# Altium PCB LAY-90818_A.brd.PcbDoc (part 1 of 6)
Units mil, origin at the board's own origin, x right, y up, seen from the top; angles counter-clockwise.
Board outline 4645.67 x 2165.35 mil, 4 copper layers (TOP, GND, POWER, BOTTOM), stack 60.45 mil thick; 414 components, 348 nets, 1441 pads, 720 vias.
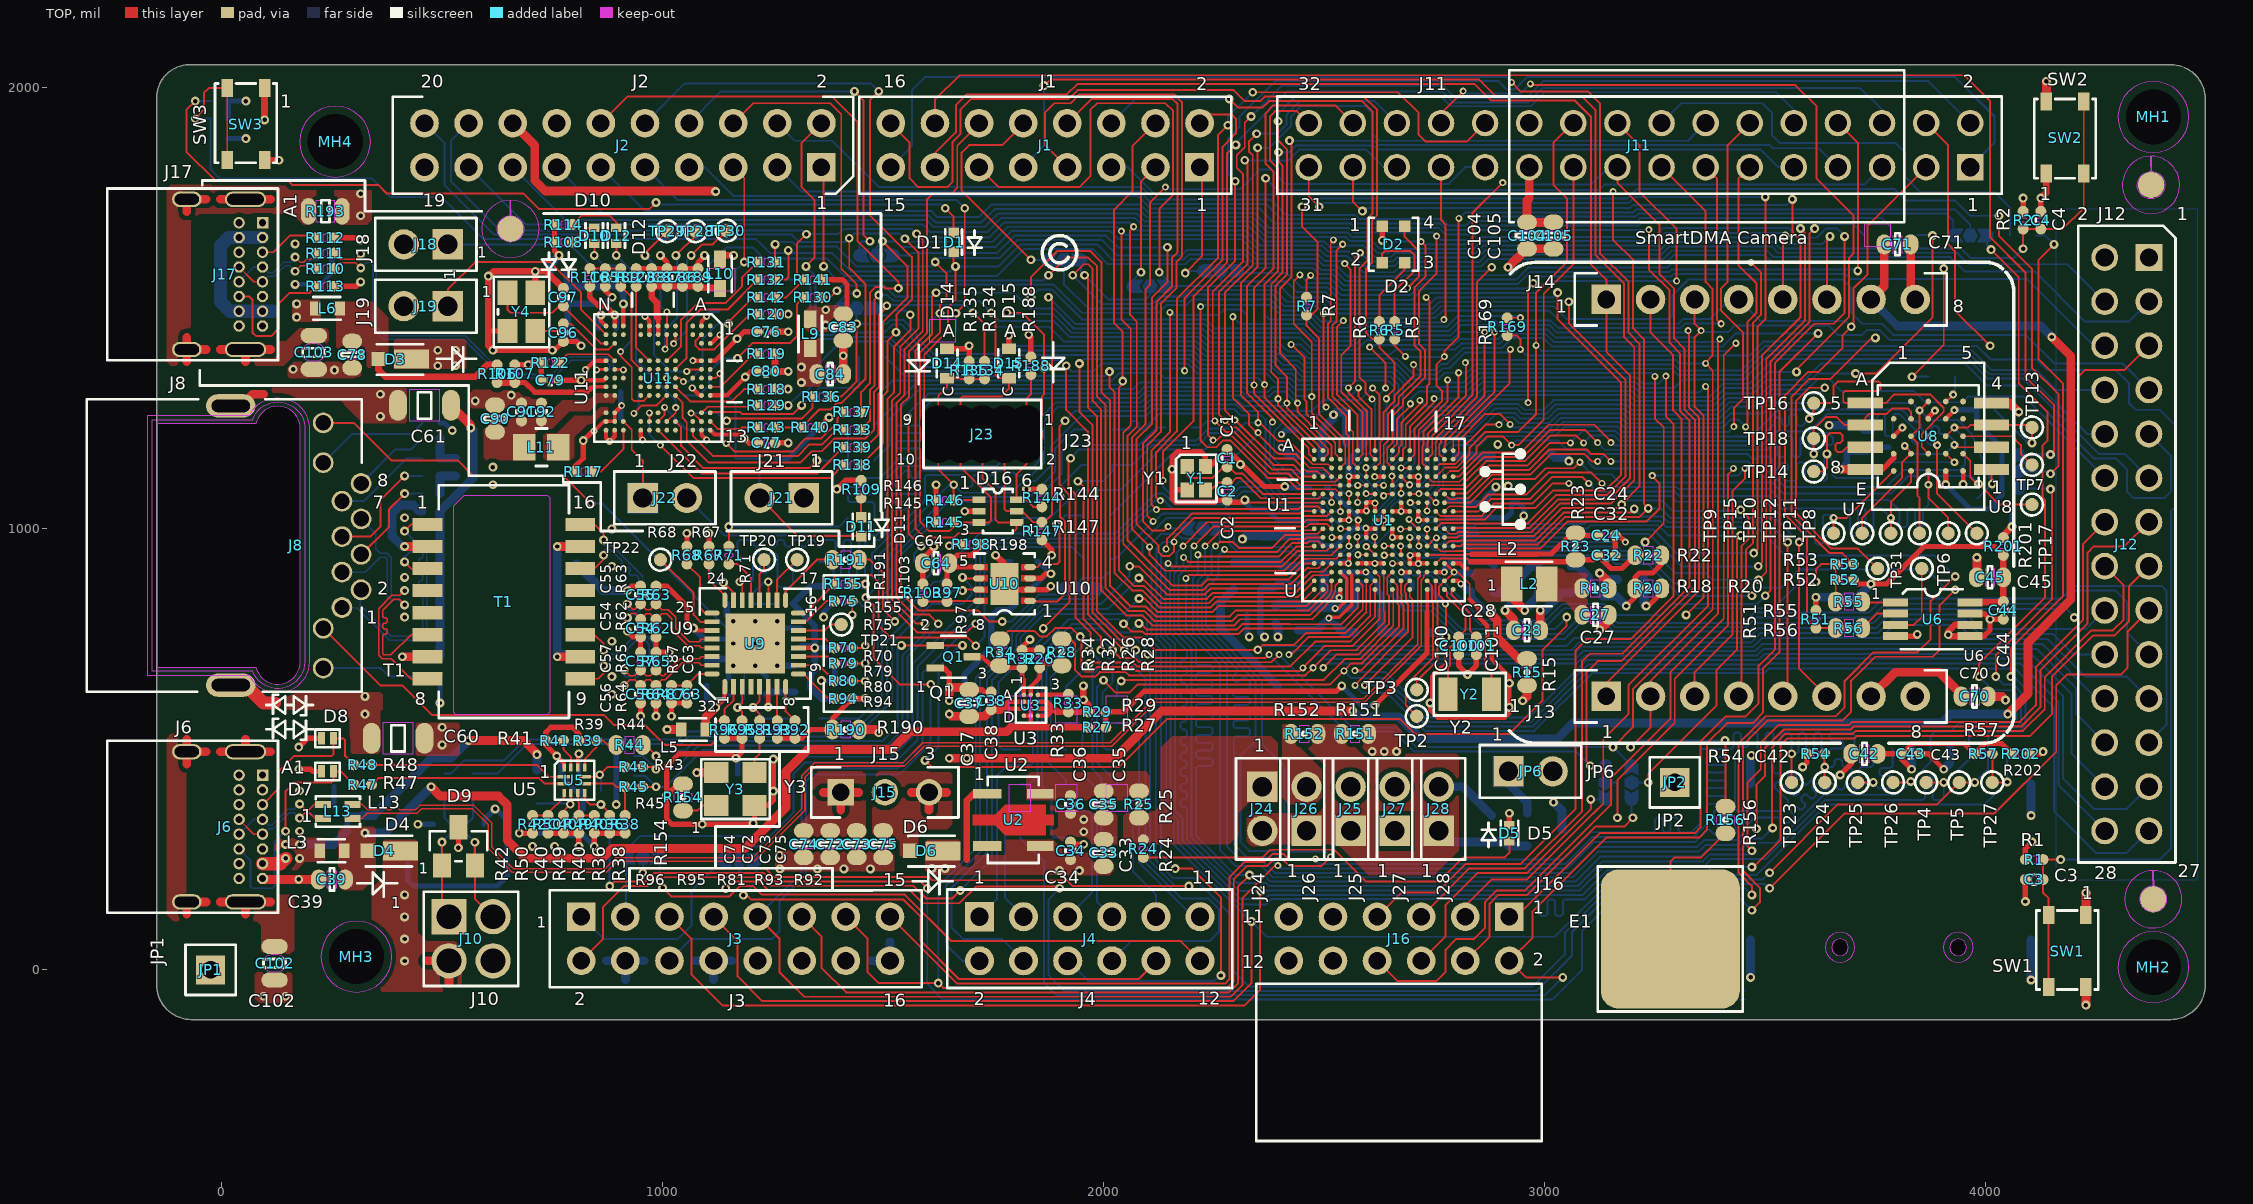
[diagram p0: TOP view]
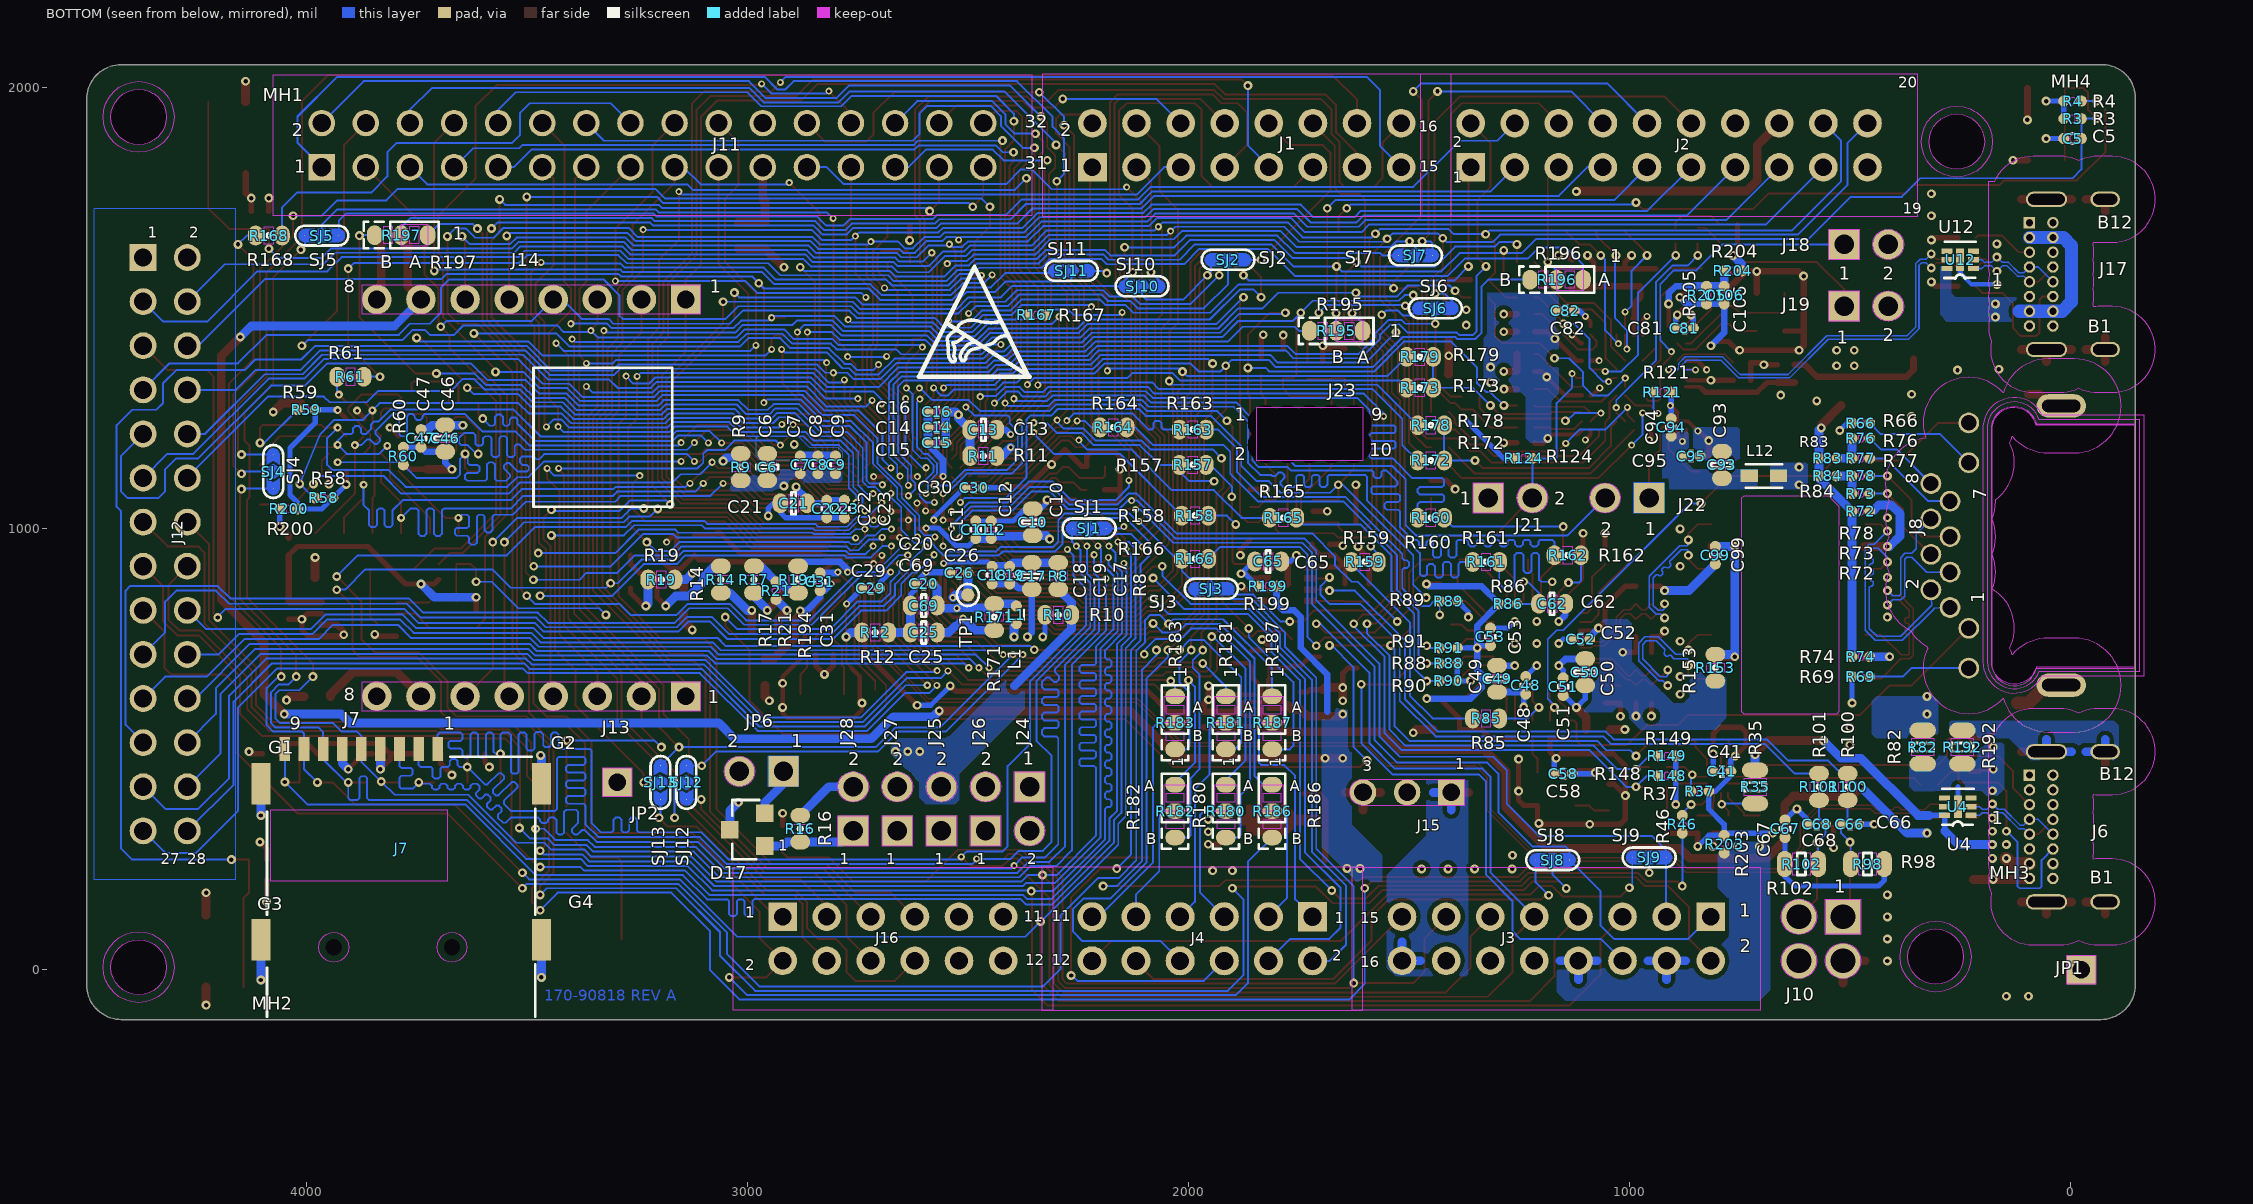
[diagram p1: BOTTOM view, seen from below]
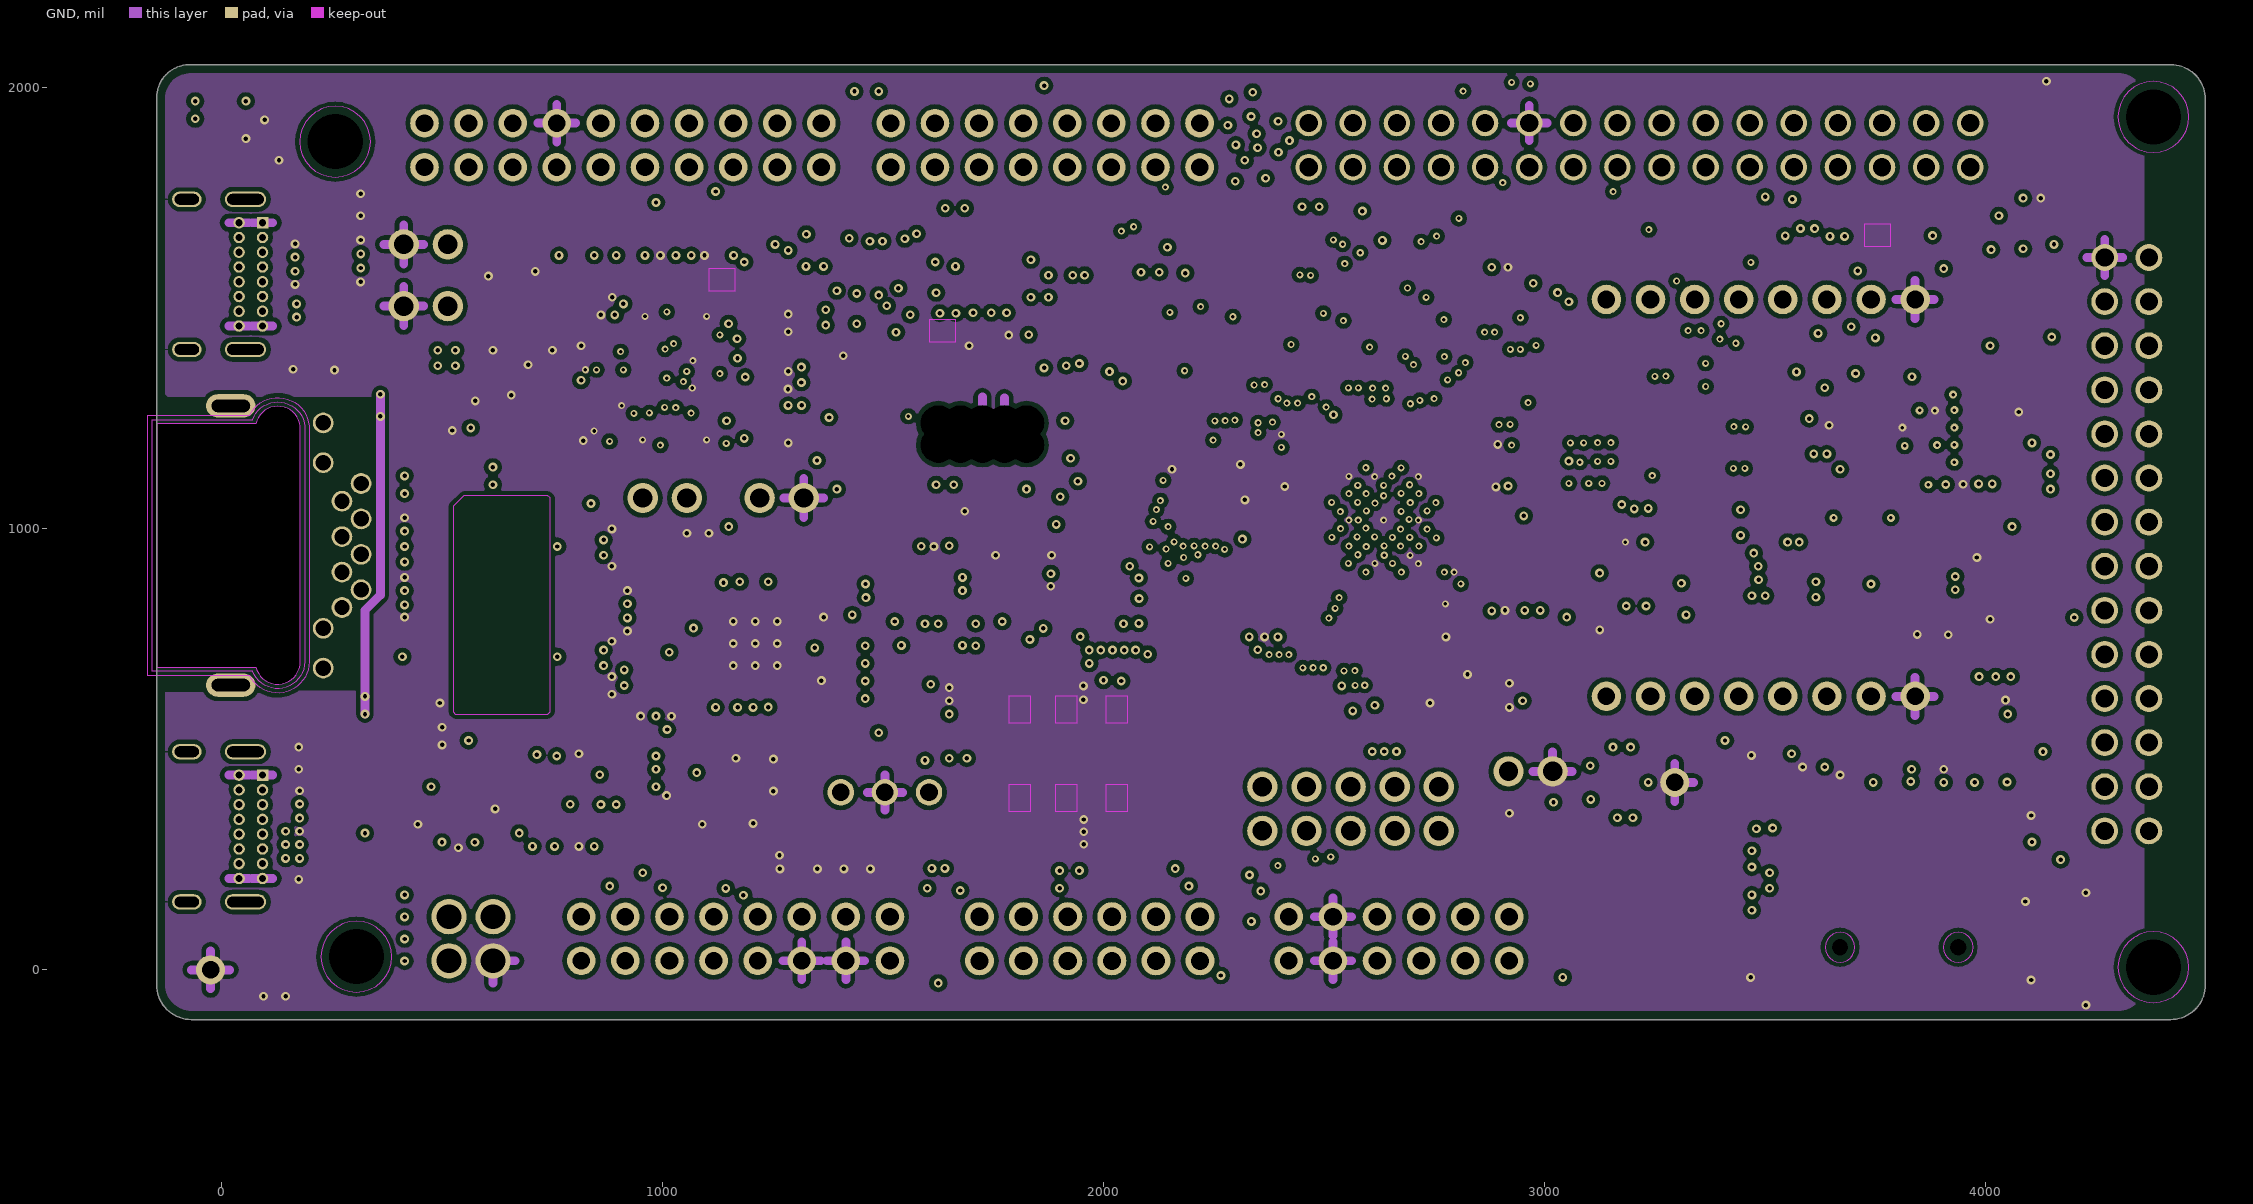
[diagram p2: GND]
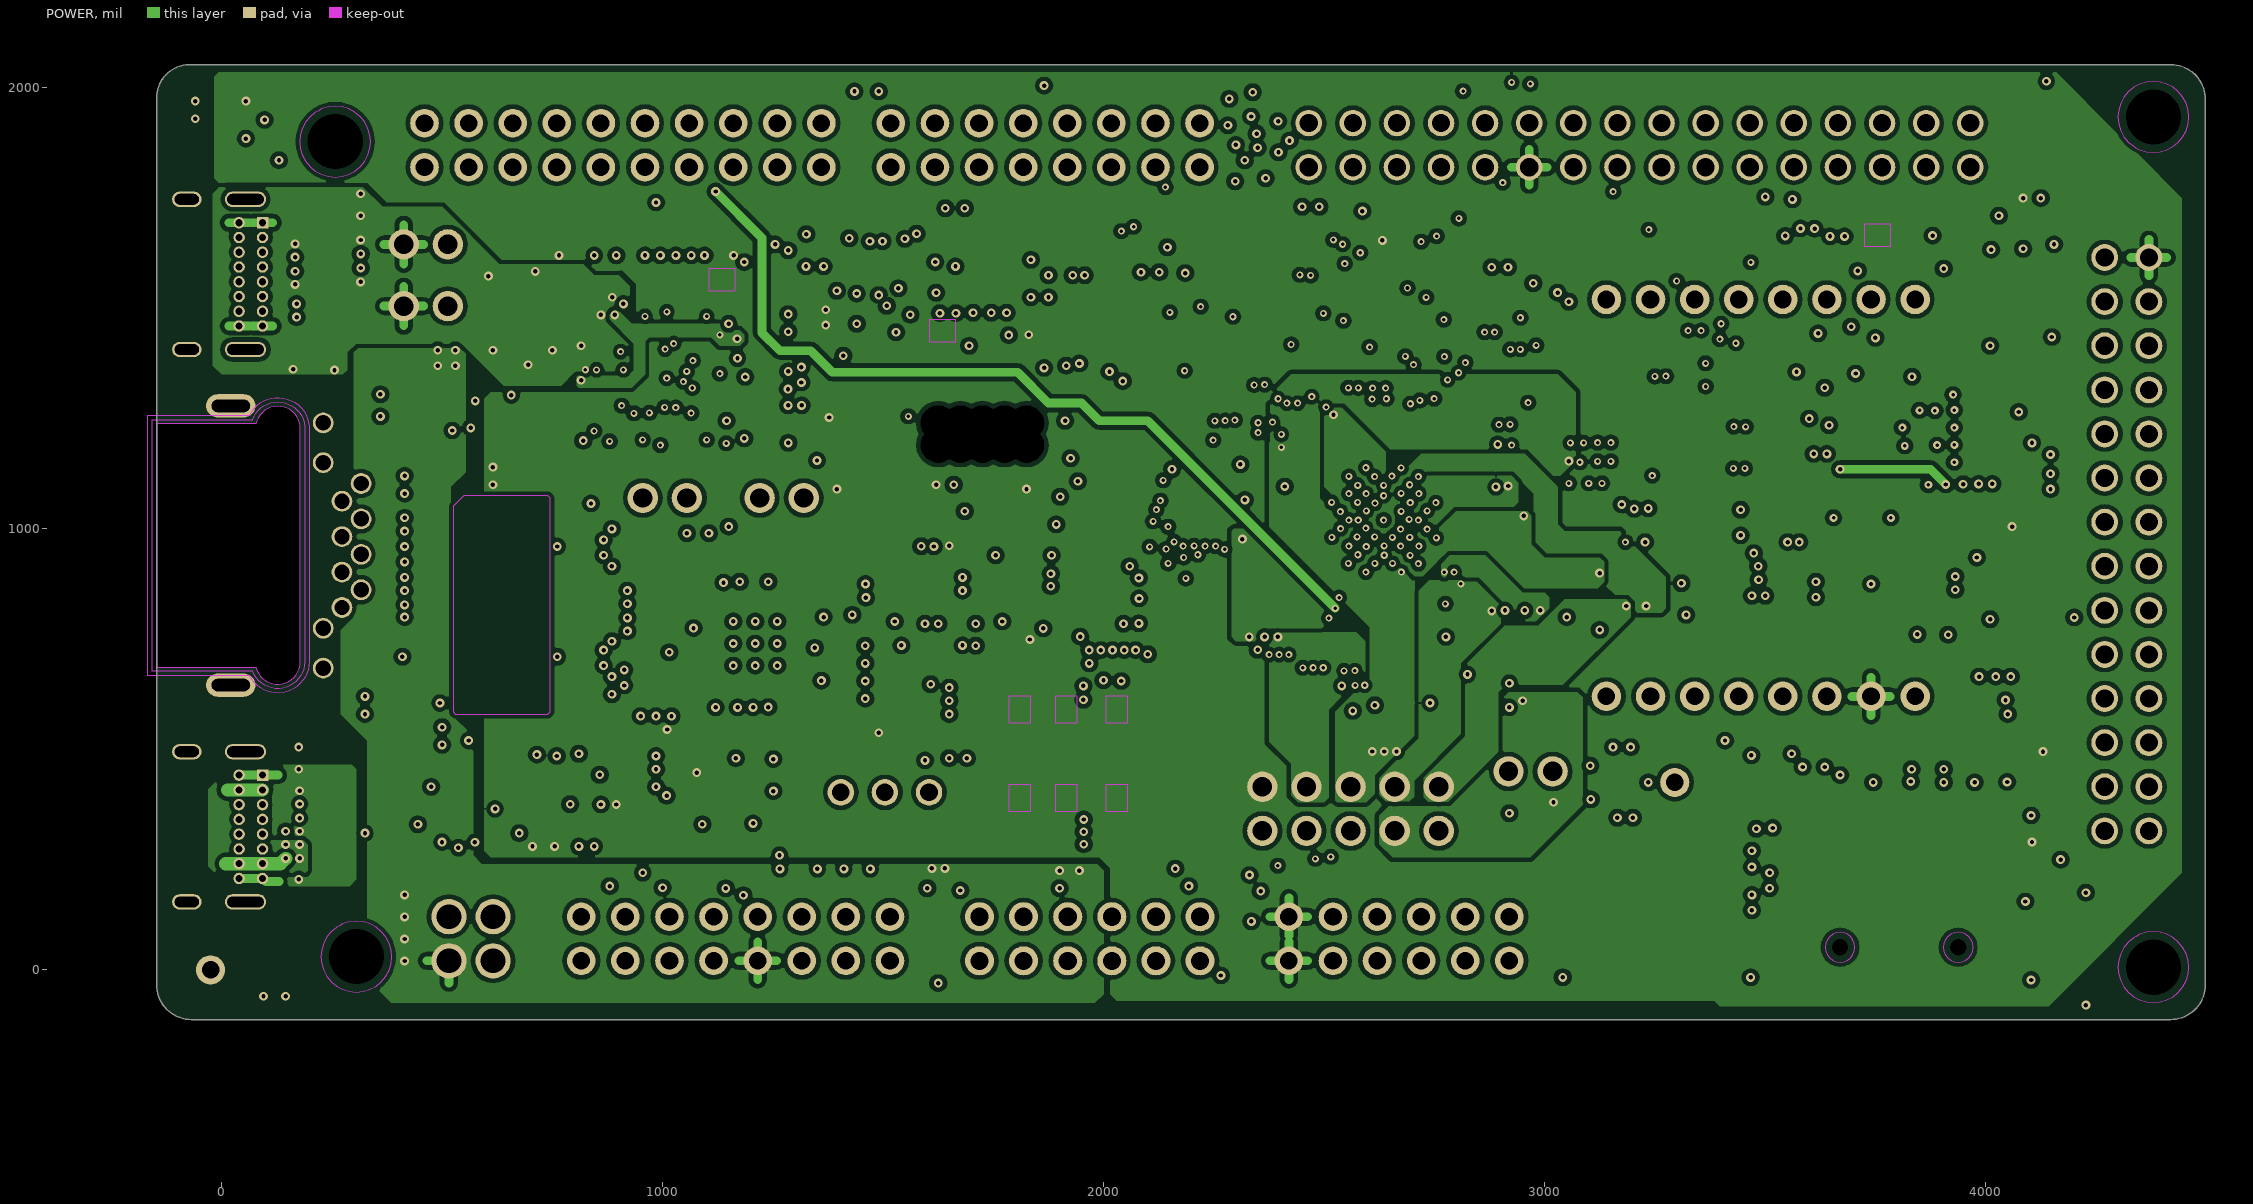
[diagram p3: POWER]

## Layer stack, top to bottom
Top Solder: solder mask 0.4, Solder Resist, Dk 3.5
TOP: signal copper 1.8
Dielectric 1: core 3.01, FR-4, Dk 4.5
GND: signal copper 1.2
Dielectric2: core 48.4299, FR-4, Dk 3.5
POWER: signal copper 1.2
Dielectric3: core 3.01, FR-4, Dk 3.5
BOTTOM: signal copper 1.8
Bottom Solder: solder mask 0.4, Solder Resist, Dk 3.5

## Board outline
4281.69,2052.68 4419.49,2052.68 cw(c4419.49,1973.94) 4498.23,1973.94 4498.23,-33.94 cw(c4419.49,-33.94) 4419.49,-112.68 4301.38,-112.68 305.31,-112.68 -68.7,-112.68 cw(c-68.7,-33.94) -147.44,-33.94 -147.44,1977.24 cw(c-71.94,1977.24) -75.18,2052.68
cut-out: -147.44,1237.84 -147.44,686.65 77.7,686.65 ccw(c127.33,698.64) 178.38,698.67 178.38,1232.2 ccw(c127.57,1226.7) 77.7,1237.84

## Design rules (kind name [scope] priority, off if disabled: settings)
Clearance [All] p1: gap=10 ignorepadtopadclearanceinfootprint=FALSE except(0: Arc-Hole Track-Hole SMDPad-Hole THPad-Hole Via-Hole Fill-Hole Poly-Hole Region-Hole Text-Hole)
DiffPairsRouting [All] p1: maxlimit=10 minlimit=10 mostfreqgap=10 toplayer_minwidth=15 toplayer_maxwidth=15 toplayer_prefwidth=15 midlayer1_minwidth=15 midlayer1_maxwidth=15 midlayer1_prefwidth=15 midlayer2_minwidth=15 midlayer2_maxwidth=15 midlayer2_prefwidth=15 bottomlayer_minwidth=15 bottomlayer_maxwidth=15 bottomlayer_prefwidth=15 maxuncoupledlength=500
PlaneConnect [All] p1: planeconnectstyle=Direct reliefexpansion=20 reliefentries=4 reliefconductorwidth=10 reliefairgap=10
PolygonConnect [All] p1: connectstyle=Direct reliefconductorwidth=10 reliefentries=4 polygonreliefangle="90 Angle" airgapwidth=10
RoomDefinition RoomsKeepOut15 [All vs False] p1: confinementstyle=ConfineOut formatcopy=TRUE lockcomponents=FALSE outline 475.86,30 474.41,52.24 470.06,74.09 462.9,95.2 453.04,115.18 440.66,133.71 425.97,150.47 409.21,165.16 390.68,177.54 370.7,187.4 349.59,194.56 327.74,198.91 305.5,200.36 283.26,198.91 261.41,194.56 240.3,187.4 220.32,177.54 201.79,165.16 185.03,150.47 170.34,133.71 157.96,115.18 148.1,95.2 140.94,74.09 136.59,52.24 135.14,30 136.59,7.76 140.94,-14.09 148.1,-35.2 157.96,-55.18 170.34,-73.71 185.03,-90.47 201.79,-105.16 220.32,-117.54 240.3,-127.4 261.41,-134.56 283.26,-138.91 305.5,-140.36 327.74,-138.91 349.59,-134.56 370.7,-127.4 390.68,-117.54 409.21,-105.16 425.97,-90.47 440.66,-73.71 453.04,-55.18 462.9,-35.2 470.06,-14.09 474.41,7.76 475.86,30
RoomDefinition RoomsKeepOut14 [All vs False] p2: confinementstyle=ConfineOut formatcopy=TRUE lockcomponents=FALSE outline 427.86,1878 426.41,1900.24 422.06,1922.09 414.9,1943.2 405.04,1963.18 392.66,1981.71 377.97,1998.47 361.21,2013.16 342.68,2025.54 322.7,2035.4 301.59,2042.56 279.74,2046.91 257.5,2048.36 235.26,2046.91 213.41,2042.56 192.3,2035.4 172.32,2025.54 153.79,2013.16 137.03,1998.47 122.34,1981.71 109.96,1963.18 100.1,1943.2 92.94,1922.09 88.59,1900.24 87.14,1878 88.59,1855.76 92.94,1833.91 100.1,1812.8 109.96,1792.82 122.34,1774.29 137.03,1757.53 153.79,1742.84 172.32,1730.46 192.3,1720.6 213.41,1713.44 235.26,1709.09 257.5,1707.64 279.74,1709.09 301.59,1713.44 322.7,1720.6 342.68,1730.46 361.21,1742.84 377.97,1757.53 392.66,1774.29 405.04,1792.82 414.9,1812.8 422.06,1833.91 426.41,1855.76 427.86,1878
RoomDefinition RoomsKeepOut13 [All vs False] p3: confinementstyle=ConfineOut formatcopy=TRUE lockcomponents=FALSE outline 4500.61,61 4499.15,83.24 4494.8,105.09 4487.64,126.2 4477.78,146.18 4465.4,164.71 4450.71,181.47 4433.95,196.16 4415.42,208.54 4395.44,218.4 4374.33,225.56 4352.48,229.91 4330.24,231.36 4308,229.91 4286.15,225.56 4265.05,218.4 4245.06,208.54 4226.53,196.16 4209.77,181.47 4195.08,164.71 4182.7,146.18 4172.84,126.2 4165.68,105.09 4161.33,83.24 4159.88,61 4161.33,38.76 4165.68,16.91 4172.84,-4.2 4182.7,-24.18 4195.08,-42.71 4209.77,-59.47 4226.53,-74.16 4245.06,-86.54 4265.05,-96.4 4286.15,-103.56 4308,-107.91 4330.24,-109.36 4352.48,-107.91 4374.33,-103.56 4395.44,-96.4 4415.42,-86.54 4433.95,-74.16 4450.71,-59.47 4465.4,-42.71 4477.78,-24.18 4487.64,-4.2 4494.8,16.91 4499.15,38.76 4500.61,61
RoomDefinition RoomsKeepin12 [All vs False] p4: confinementstyle=ConfineIn formatcopy=TRUE lockcomponents=FALSE outline 4430,-85 4470,-45 4470,1975 4415,2030 -80,2030 -135,1975 -135,-40 -80,-95 60,-95 65,-95 80,-110 170,-110 195,-85
RoomDefinition RoomsKeepin11 [All vs False] p5: confinementstyle=ConfineIn formatcopy=TRUE lockcomponents=FALSE outline 4430,-85 4470,-45 4470,1975 4415,2030 -80,2030 -135,1975 -135,-40 -80,-95 60,-95 65,-95 80,-110 170,-110 195,-85
RoomDefinition RoomsKeepOut10 [All vs False] p6: confinementstyle=ConfineOut formatcopy=TRUE lockcomponents=FALSE outline 4500.61,6 4499.13,24.83 4494.72,43.2 4487.49,60.65 4477.62,76.75 4465.36,91.12 4450.99,103.38 4434.89,113.25 4417.44,120.48 4399.07,124.89 4380.24,126.37 4361.41,124.89 4343.04,120.48 4325.59,113.25 4320.22,109.96 4309.49,103.38 4295.13,91.12 4282.86,76.75 4272.99,60.65 4265.76,43.2 4261.35,24.83 4259.87,6 4261.35,-12.83 4265.76,-31.2 4272.99,-48.65 4282.86,-64.75 4295.13,-79.12 4309.49,-91.38 4320.22,-97.96 4325.59,-101.25 4343.04,-108.48 4361.41,-112.89 4380.24,-114.37 4399.07,-112.89 4417.44,-108.48 4434.89,-101.25 4450.99,-91.38 4465.36,-79.12 4477.62,-64.75 4487.49,-48.65 4494.72,-31.2 4499.13,-12.83 4500.61,6
RoomDefinition RoomsKeepOut9 [All vs False] p7: confinementstyle=ConfineOut formatcopy=TRUE lockcomponents=FALSE outline 4500.61,6 4499.13,24.83 4494.72,43.2 4487.49,60.65 4477.62,76.75 4465.36,91.12 4450.99,103.38 4434.89,113.25 4417.44,120.48 4399.07,124.89 4380.24,126.37 4361.41,124.89 4343.04,120.48 4325.59,113.25 4320.22,109.96 4309.49,103.38 4295.13,91.12 4282.86,76.75 4272.99,60.65 4265.76,43.2 4261.35,24.83 4259.87,6 4261.35,-12.83 4265.76,-31.2 4272.99,-48.65 4282.86,-64.75 4295.13,-79.12 4309.49,-91.38 4320.22,-97.96 4325.59,-101.25 4343.04,-108.48 4361.41,-112.89 4380.24,-114.37 4399.07,-112.89 4417.44,-108.48 4434.89,-101.25 4450.99,-91.38 4465.36,-79.12 4477.62,-64.75 4487.49,-48.65 4494.72,-31.2 4499.13,-12.83 4500.61,6
RoomDefinition RoomsKeepOut8 [All vs False] p8: confinementstyle=ConfineOut formatcopy=TRUE lockcomponents=FALSE outline 4500.61,1884 4499.15,1906.24 4494.8,1928.09 4487.64,1949.2 4477.78,1969.18 4465.4,1987.71 4450.71,2004.47 4433.95,2019.16 4415.42,2031.54 4395.44,2041.4 4374.33,2048.56 4352.48,2052.91 4330.24,2054.36 4308,2052.91 4286.15,2048.56 4265.05,2041.4 4245.06,2031.54 4226.53,2019.16 4209.77,2004.47 4195.08,1987.71 4182.7,1969.18 4172.84,1949.2 4165.68,1928.09 4161.33,1906.24 4159.88,1884 4161.33,1861.76 4165.68,1839.91 4172.84,1818.8 4182.7,1798.82 4195.08,1780.29 4209.77,1763.53 4226.53,1748.84 4245.06,1736.46 4265.05,1726.6 4286.15,1719.44 4308,1715.09 4330.24,1713.64 4352.48,1715.09 4374.33,1719.44 4395.44,1726.6 4415.42,1736.46 4433.95,1748.84 4450.71,1763.53 4465.4,1780.29 4477.78,1798.82 4487.64,1818.8 4494.8,1839.91 4499.15,1861.76 4500.61,1884
RoomDefinition RoomsKeepOut7 [All vs False] p9: confinementstyle=ConfineOut formatcopy=TRUE lockcomponents=FALSE outline 4500.61,1934 4499.13,1952.83 4494.72,1971.2 4487.49,1988.65 4477.62,2004.75 4465.36,2019.12 4450.99,2031.38 4434.89,2041.25 4417.44,2048.48 4399.07,2052.89 4380.24,2054.37 4361.41,2052.89 4343.04,2048.48 4325.59,2041.25 4320.22,2037.96 4309.49,2031.38 4295.13,2019.12 4282.86,2004.75 4272.99,1988.65 4265.76,1971.2 4261.35,1952.83 4259.87,1934 4261.35,1915.17 4265.76,1896.8 4272.99,1879.35 4282.86,1863.25 4295.13,1848.88 4309.49,1836.62 4320.22,1830.04 4325.59,1826.75 4343.04,1819.52 4361.41,1815.11 4380.24,1813.63 4399.07,1815.11 4417.44,1819.52 4434.89,1826.75 4450.99,1836.62 4465.36,1848.88 4477.62,1863.25 4487.49,1879.35 4494.72,1896.8 4499.13,1915.17 4500.61,1934
RoomDefinition RoomsKeepOut6 [All vs False] p10: confinementstyle=ConfineOut formatcopy=TRUE lockcomponents=FALSE outline 4500.61,1934 4499.13,1952.83 4494.72,1971.2 4487.49,1988.65 4477.62,2004.75 4465.36,2019.12 4450.99,2031.38 4434.89,2041.25 4417.44,2048.48 4399.07,2052.89 4380.24,2054.37 4361.41,2052.89 4343.04,2048.48 4325.59,2041.25 4320.22,2037.96 4309.49,2031.38 4295.13,2019.12 4282.86,2004.75 4272.99,1988.65 4265.76,1971.2 4261.35,1952.83 4259.87,1934 4261.35,1915.17 4265.76,1896.8 4272.99,1879.35 4282.86,1863.25 4295.13,1848.88 4309.49,1836.62 4320.22,1830.04 4325.59,1826.75 4343.04,1819.52 4361.41,1815.11 4380.24,1813.63 4399.07,1815.11 4417.44,1819.52 4434.89,1826.75 4450.99,1836.62 4465.36,1848.88 4477.62,1863.25 4487.49,1879.35 4494.72,1896.8 4499.13,1915.17 4500.61,1934
RoomDefinition RoomsKeepOut5 [All vs False] p11: confinementstyle=ConfineOut formatcopy=TRUE lockcomponents=FALSE outline 377.87,1878 376.39,1896.83 371.98,1915.2 364.75,1932.65 354.88,1948.75 342.62,1963.12 328.25,1975.38 312.15,1985.25 294.7,1992.48 276.33,1996.89 257.5,1998.37 238.67,1996.89 220.3,1992.48 202.85,1985.25 197.48,1981.96 186.75,1975.38 172.38,1963.12 160.12,1948.75 150.25,1932.65 143.02,1915.2 138.61,1896.83 137.13,1878 138.61,1859.17 143.02,1840.8 150.25,1823.35 160.12,1807.25 172.38,1792.88 186.75,1780.62 197.48,1774.04 202.85,1770.75 220.3,1763.52 238.67,1759.11 257.5,1757.63 276.33,1759.11 294.7,1763.52 312.15,1770.75 328.25,1780.62 342.62,1792.88 354.88,1807.25 364.75,1823.35 371.98,1840.8 376.39,1859.17 377.87,1878
RoomDefinition RoomsKeepOut4 [All vs False] p12: confinementstyle=ConfineOut formatcopy=TRUE lockcomponents=FALSE outline 377.87,1878 376.39,1896.83 371.98,1915.2 364.75,1932.65 354.88,1948.75 342.62,1963.12 328.25,1975.38 312.15,1985.25 294.7,1992.48 276.33,1996.89 257.5,1998.37 238.67,1996.89 220.3,1992.48 202.85,1985.25 197.48,1981.96 186.75,1975.38 172.38,1963.12 160.12,1948.75 150.25,1932.65 143.02,1915.2 138.61,1896.83 137.13,1878 138.61,1859.17 143.02,1840.8 150.25,1823.35 160.12,1807.25 172.38,1792.88 186.75,1780.62 197.48,1774.04 202.85,1770.75 220.3,1763.52 238.67,1759.11 257.5,1757.63 276.33,1759.11 294.7,1763.52 312.15,1770.75 328.25,1780.62 342.62,1792.88 354.88,1807.25 364.75,1823.35 371.98,1840.8 376.39,1859.17 377.87,1878
RoomDefinition RoomsKeepOut3 [All vs False] p13: confinementstyle=ConfineOut formatcopy=TRUE lockcomponents=FALSE outline 425.87,30 424.39,48.83 419.98,67.2 412.75,84.65 402.88,100.75 390.62,115.12 376.25,127.38 360.15,137.25 342.7,144.48 324.33,148.89 305.5,150.37 286.67,148.89 268.3,144.48 250.85,137.25 245.48,133.96 234.75,127.38 220.38,115.12 208.12,100.75 198.25,84.65 191.02,67.2 186.61,48.83 185.13,30 186.61,11.17 191.02,-7.2 198.25,-24.65 208.12,-40.75 220.38,-55.12 234.75,-67.38 245.48,-73.96 250.85,-77.25 268.3,-84.48 286.67,-88.89 305.5,-90.37 324.33,-88.89 342.7,-84.48 360.15,-77.25 376.25,-67.38 390.62,-55.12 402.88,-40.75 412.75,-24.65 419.98,-7.2 424.39,11.17 425.87,30
RoomDefinition RoomsKeepOut2 [All vs False] p14: confinementstyle=ConfineOut formatcopy=TRUE lockcomponents=FALSE outline 425.87,30 424.39,48.83 419.98,67.2 412.75,84.65 402.88,100.75 390.62,115.12 376.25,127.38 360.15,137.25 342.7,144.48 324.33,148.89 305.5,150.37 286.67,148.89 268.3,144.48 250.85,137.25 245.48,133.96 234.75,127.38 220.38,115.12 208.12,100.75 198.25,84.65 191.02,67.2 186.61,48.83 185.13,30 186.61,11.17 191.02,-7.2 198.25,-24.65 208.12,-40.75 220.38,-55.12 234.75,-67.38 245.48,-73.96 250.85,-77.25 268.3,-84.48 286.67,-88.89 305.5,-90.37 324.33,-88.89 342.7,-84.48 360.15,-77.25 376.25,-67.38 390.62,-55.12 402.88,-40.75 412.75,-24.65 419.98,-7.2 424.39,11.17 425.87,30
RoutingVias [All] p1: holewidth=28 width=50 viastyle="Through Hole" minholewidth=28 minwidth=50 maxholewidth=28 maxwidth=50
SolderMaskExpansion [All] p1: expansion=4 istentingtop=FALSE
Width [All] p1: maxlimit=10 minlimit=10 preferedwidth=10 impedanceprofiledriven=TRUE minimp=60.000000 maximp=60.000000 favimp=60.000000
28 further rules are at their usual default settings.

## Classes and differential pairs
differential pair DIFFPAIR7: +MCX_USB1_DM -MCX_USB1_DP
differential pair DIFFPAIR3: +MCU_LINK_USB_DN -MCU_LINK_USB_DP
differential pair DIFFPAIR6: +LPC_USB1_DM -LPC_USB1_DP
differential pair DIFFPAIR2: +HS_USB_DN -HS_USB_DP
differential pair DIFFPAIR0: +ENET_TXN -ENET_TXP
differential pair DIFFPAIR1: +ENET_RXN -ENET_RXP
differential pair DIFFPAIR5: +ENET_CON_TXN -ENET_CON_TXP
differential pair DIFFPAIR4: +ENET_CON_RXN -ENET_CON_RXP

## Components (designator, comment, footprint, x,y, rotation, side; value= is the part's Value field where it differs from the comment)
C1 "CAP_NP_CC0402_25_DISCRETE_0.5 MM_150-80750_4.7PF" CC0402_25#1 2280,1160 r90 top
C2 "CAP_NP_CC0402_25_DISCRETE_0.5 MM_150-80750_4.7PF" CC0402_25#1 2280,1085 r270 top
C3 "CAP_NP_CC0402_25_DISCRETE_0.635MM_150-75182_0.1UF_10%" CC0402_25#1 4110,205 r180 top
C4 "CAP_NP_CC0402_25_DISCRETE_0.635MM_150-75182_0.1UF" CC0402_25#1 4125,1700 r90 top
C5 "CAP_NP_CC0402_25_DISCRETE_0.635MM_150-75182_0.1UF_10%" CC0402_25#1 -5,1885 r0 bottom
C6 "CAP_NP_CC0603_OV_DISCRETE_0.87MM_150-81891_1UF" CC0603_OV#1 2955,1140 r90 bottom
C7 "CAP_NP_CC0402_25_DISCRETE_0.635MM_150-75182_0.1UF_10%" CC0402_25#1 2880,1145 r90 bottom
C8 "CAP_NP_CC0402_25_DISCRETE_0.635MM_150-75182_0.1UF_10%" CC0402_25#1 2840,1145 r90 bottom
C9 "CAP_NP_CC0402_25_DISCRETE_0.635MM_150-75182_0.1UF_10%" CC0402_25#1 2800,1145 r90 bottom
C10 "CAP_NP_CC0603_OV_DISCRETE_0.87MM_150-81891_1UF" CC0603_OV#1 2353,1015 r90 bottom
C11 "CAP_NP_CC0402_25_DISCRETE_0.635MM_150-75182_0.1UF_10%" CC0402_25#1 2482,998 r90 bottom
C12 "CAP_NP_CC0402_25_DISCRETE_0.635MM_150-75182_0.1UF_10%" CC0402_25#1 2447,998 r90 bottom
C13 "CAP_NP_CC0603_OV_DISCRETE_0.87MM_150-81891_1UF" CC0603_OV#2 2465,1225 r0 bottom
C14 "CAP_NP_CC0402_25_DISCRETE_0.635MM_150-75182_0.1UF_10%" CC0402_25#1 2570,1230 r0 bottom
C15 "CAP_NP_CC0402_25_DISCRETE_0.635MM_150-75182_0.1UF_10%" CC0402_25#1 2570,1195 r0 bottom
C16 "CAP_NP_CC0402_25_DISCRETE_0.635MM_150-75182_0.1UF_10%" CC0402_25#1 2570,1265 r0 bottom
C17 "CAP_NP_CC0603_OV_DISCRETE_0.87MM_150-81891_1UF" CC0603_OV#1 2355,893 r270 bottom
C18 "CAP_NP_CC0402_25_DISCRETE_0.635MM_150-75182_0.1UF_10%" CC0402_25#1 2445,895 r270 bottom
C19 "CAP_NP_CC0402_25_DISCRETE_0.635MM_150-75182_0.1UF_10%" CC0402_25#1 2405,895 r270 bottom
C20 "CAP_NP_CC0402_25_DISCRETE_0.635MM_150-75182_0.1UF_10%" CC0402_25#1 2600,875 r0 bottom
C21 "CAP_NP_CC0603_OV_DISCRETE_0.87MM_150-81891_1UF" CC0603_OV#2 2895,1058 r0 bottom
C22 "CAP_NP_CC0402_25_DISCRETE_0.635MM_150-75182_0.1UF_10%" CC0402_25#1 2820,1045 r90 bottom
C23 "CAP_NP_CC0402_25_DISCRETE_0.635MM_150-75182_0.1UF_10%" CC0402_25#1 2780,1045 r90 bottom
C24 "CAP_NP_CC0402_25_DISCRETE_0.635MM_150-75182_0.1UF_10%" CC0402_25#1 3140,985 r0 top
C25 "CAP_NP_CC0603_OV_DISCRETE_0.87MM_150-81891_1UF" CC0603_OV#1 2600,765 r0 bottom
C26 "CAP_NP_CC0402_25_DISCRETE_0.55MM_150-78886_0.22UF" CC0402_25#1 2520,900 r0 bottom
C27 "CAP_NP_CC0603_OV_DISCRETE_1MM_150-79711_6.8UF" CC0603_OV#1 3115,805 r0 top
C28 "CAP_NP_CC0603_OV_DISCRETE_0.87MM_150-81893_4.7UF_10%" CC0603_OV#1 2960,770 r180 top
C29 "CAP_NP_CC0402_25_DISCRETE_0.635MM_150-75182_0.1UF_10%" CC0402_25#1 2720,865 r0 bottom
C30 "CAP_NP_CC0402_25_DISCRETE_0.635MM_150-75182_0.1UF_10%" CC0402_25#2 2486,1093 r0 bottom
C31 "CAP_NP_CC0402_25_DISCRETE_0.635MM_150-75182_0.1UF_10%" CC0402_25#1 2835,880 r90 bottom
C32 "CAP_NP_CC0402_25_DISCRETE_0.635MM_150-75182_0.1UF_10%" CC0402_25#1 3140,940 r0 top
C33 "CAP_NP_CC0603_OV_DISCRETE_0.87MM_150-81893_4.7UF_10%" CC0603_OV#1 2000,265 r90 top
C34 "CAP_NP_CC0402_25_DISCRETE_0.635MM_150-75182_0.1UF" CC0402_25#1 1925,270 r90 top
C35 "CAP_NP_CC0603_OV_DISCRETE_0.87MM_150-81893_4.7UF_10%" CC0603_OV#1 2000,375 r270 top
C36 "CAP_NP_CC0402_25_DISCRETE_0.635MM_150-75182_0.1UF" CC0402_25#1 1925,375 r270 top
C37 "CAP_NP_CC0603_OV_DISCRETE_1MM_150-79569_10UF" CC0603_OV#1 1695,605 r90 top
C38 "CAP_NP_CC0402_25_DISCRETE_0.55MM_150-78886_0.22UF" CC0402_25#1 1745,610 r90 top
C39 "CAP_NP_CC0603_OV_DISCRETE_0.87MM_150-81893_4.7UF_20%" CC0603_OV#1 250,205 r180 top
C40 "CAP_NP_CC0402_25_DISCRETE_0.55MM_150-78886_0.22UF" CC0402_25#1 775,330 r270 top
C41 "CAP_NP_CC0402_25_DISCRETE_0.55MM_150-78886_0.22UF" CC0402_25#1 790,450 r0 bottom
C42 "CAP_NP_CC0603_OV_DISCRETE_0.87MM_150-81891_1UF" CC0603_OV#1 3725,490 r180 top
C43 "CAP_NP_CC0402_25_DISCRETE_0.635MM_150-75182_0.1UF_10%" CC0402_25#1 3830,490 r0 top
C44 "CAP_NP_CC0402_25_DISCRETE_0.635MM_150-75182_0.1UF" CC0402_25#1 4040,815 r270 top
C45 "CAP_NP_CC0603_OV_DISCRETE_0.87MM_150-81891_1UF" CC0603_OV#1 4010,890 r180 top
C46 "CAP_NP_CC0603_OV_DISCRETE_0.87MM_150-81891_1UF" CC0603_OV#1 3685,1205 r90 bottom
C47 "CAP_NP_CC0402_25_DISCRETE_0.635MM_150-75182_0.1UF_10%" CC0402_25#1 3740,1205 r90 bottom
C48 "CAP_NP_CC0402_25_DISCRETE_0.55MM_150-30004_470PF" CC0402_25#1 1235,645 r90 bottom
C49 "CAP_NP_CC0603_OV_DISCRETE_0.87MM_150-81891_1UF" CC0603_OV#1 1300,660 r90 bottom
C50 "CAP_NP_CC0603_OV_DISCRETE_1MM_150-79530_22UF" CC0603_OV#1 1100,675 r90 bottom
C51 "CAP_NP_CC0402_25_DISCRETE_0.635MM_150-75182_0.1UF_10%" CC0402_25#1 1150,642 r90 bottom
C52 "CAP_NP_CC0402_25_DISCRETE_0.635MM_150-75182_0.1UF_10%" CC0402_25#1 1110,750 r0 bottom
C53 "CAP_NP_CC0402_25_DISCRETE_0.635MM_150-75182_0.1UF_10%" CC0402_25#1 1315,755 r90 bottom
C54 "CAP_NP_CC0402_25_DISCRETE_0.55 MM_150-81667_15PF" CC0402_25#1 950,775 r270 top
C55 "CAP_NP_CC0402_25_DISCRETE_0.55 MM_150-81667_15PF" CC0402_25#1 950,850 r90 top
C56 "CAP_NP_CC0402_25_DISCRETE_0.55 MM_150-81667_15PF" CC0402_25#1 950,625 r270 top
C57 "CAP_NP_CC0402_25_DISCRETE_0.55 MM_150-81667_15PF" CC0402_25#1 950,700 r90 top
C58 "CAP_NP_CC0402_25_DISCRETE_0.635MM_150-75182_0.1UF_10%" CC0402_25#1 1150,445 r0 bottom
C60 "CAP_NP_CC1206_OV_DISCRETE_1.8MM_150-79103_1000PF" CC1206_OV 400,525 r0 top
C61 "CAP_NP_CC1206_OV_DISCRETE_1.8MM_150-79103_1000PF" CC1206_OV 460,1280 r180 top
C62 "CAP_NP_CC0603_OV_DISCRETE_1MM_150-79569_10UF" CC0603_OV#2 1175,830 r0 bottom
C63 "CAP_NP_CC0402_25_DISCRETE_0.56 MM_150-79188_100PF" CC0402_25#1 1055,625 r270 top
C64 "CAP_NP_CC0603_OV_DISCRETE_0.87MM_150-81891_1UF" CC0603_OV#1 1620,922 r180 top
C65 "CAP_NP_CC0603_OV_DISCRETE_0.87MM_150-81891_1UF" CC0603_OV#2 1819,926 r0 bottom
C66 "CAP_NP_CC0402_25_DISCRETE_0.55 MM_150-30269_56PF" CC0402_25#2 500,330 r0 bottom
C67 "CAP_NP_CC0402_25_DISCRETE_0.55 MM_150-30114_0.01UF" CC0402_25#1 647,320 r90 bottom
C68 "CAP_NP_CC0402_25_DISCRETE_0.55 MM_150-30269_56PF" CC0402_25#1 575,330 r0 bottom
C69 "CAP_NP_CC0603_OV_DISCRETE_1MM_150-79569_10UF" CC0603_OV#1 2600,826 r0 bottom
C70 "CAP_NP_CC0603_OV_DISCRETE_1MM_150-79569_10UF" CC0603_OV#1 3975,620 r0 top
C71 "CAP_NP_CC0603_OV_DISCRETE_1MM_150-79569_10UF" CC0603_OV#1 3800,1645 r0 top
C72 "CAP_NP_CC0603_OV_DISCRETE_1MM_150-79569_10UF" CC0603_OV#1 1380,285 r270 top
C73 "CAP_NP_CC0603_OV_DISCRETE_1MM_150-79569_10UF" CC0603_OV#1 1440,285 r270 top
C74 "CAP_NP_CC0603_OV_DISCRETE_1MM_150-79569_10UF" CC0603_OV#1 1320,285 r270 top
C75 "CAP_NP_CC0603_OV_DISCRETE_1MM_150-79569_10UF" CC0603_OV#1 1500,285 r270 top
C76 "CAP_NP_CC0402_25_DISCRETE_0.635MM_150-75182_0.1UF_10%" CC0402_25#1 1234.7,1446.9 r0 top
C77 "CAP_NP_CC0402_25_DISCRETE_0.635MM_150-75182_0.1UF_10%" CC0402_25#1 1235,1195 r0 top
C78 "CAP_NP_CC0603_OV_DISCRETE_0.87MM_150-81893_4.7UF_20%" CC0603_OV#1 296,1395 r270 top
C79 "CAP_NP_CC0402_25_DISCRETE_0.635MM_150-75182_0.1UF_10%" CC0402_25#1 744.7,1336.9 r180 top
C80 "CAP_NP_CC0402_25_DISCRETE_0.635MM_150-75182_0.1UF_10%" CC0402_25#1 1234.7,1356.9 r0 top
C81 "CAP_NP_CC0402_25_DISCRETE_0.635MM_150-75182_0.1UF_10%" CC0402_25#2 875,1455 r0 bottom
C82 "CAP_NP_CC0402_25_DISCRETE_0.635MM_150-75182_0.1UF_10%" CC0402_25#2 1145,1495 r0 bottom
C83 "CAP_NP_CC0603_OV_DISCRETE_1MM_150-79569_10UF" CC0603_OV#1 1409.7,1456.9 r270 top
C84 "CAP_NP_CC0603_OV_DISCRETE_1MM_150-79569_10UF" CC0603_OV#1 1380,1351 r0 top
C85 "CAP_NP_CC0402_25_DISCRETE_0.635MM_150-75182_0.1UF_10%" CC0402_25#1 870,1570 r270 top
C86 "CAP_NP_CC0402_25_DISCRETE_0.635MM_150-75182_0.1UF_10%" CC0402_25#1 1045,1570 r90 top
C87 "CAP_NP_CC0402_25_DISCRETE_0.64 MM_150-75169_47PF" CC0402_25#1 1010,1570 r90 top
C88 "CAP_NP_CC0402_25_DISCRETE_0.635MM_150-75182_0.1UF_10%" CC0402_25#1 975,1570 r90 top
C89 "CAP_NP_CC0402_25_DISCRETE_0.64 MM_150-75169_47PF" CC0402_25#1 1080,1570 r90 top
C90 "CAP_NP_CC0603_OV_DISCRETE_1MM_150-79530_22UF" CC0603_OV#1 620,1250 r90 top
C91 "CAP_NP_CC0402_25_DISCRETE_0.635MM_150-75182_0.1UF_10%" CC0402_25#1 680,1265 r90 top
C92 "CAP_NP_CC0402_25_DISCRETE_0.64 MM_150-75169_47PF" CC0402_25#1 725,1265 r90 top
C93 "CAP_NP_CC0603_OV_DISCRETE_1MM_150-79530_22UF" CC0603_OV#1 790,1145 r90 bottom
C94 "CAP_NP_CC0402_25_DISCRETE_0.635MM_150-75182_0.1UF_10%" CC0402_25#1 905,1230 r90 bottom
C95 "CAP_NP_CC0402_25_DISCRETE_0.64 MM_150-75169_47PF" CC0402_25#2 860,1165 r0 bottom
C96 "CAP_NP_CC0402_25_DISCRETE_0.55 MM_150-30180_12PF" CC0402_25#1 775,1445 r270 top
C97 "CAP_NP_CC0402_25_DISCRETE_0.55 MM_150-30180_12PF" CC0402_25#1 775,1525 r90 top
C99 "CAP_NP_CC0402_25_DISCRETE_0.635MM_150-75182_0.1UF_10%" CC0402_25#1 805,940 r270 bottom
C100 "CAP_NP_CC0402_25_DISCRETE_0.5 MM_150-80750_4.7PF" CC0402_25#1 2805,735 r270 top
C101 "CAP_NP_CC0402_25_DISCRETE_0.5 MM_150-80750_4.7PF" CC0402_25#1 2845,735 r270 top
C102 "CAP_NP_CC0805_OV_DISCRETE_1.4732 MM_150-75010_0.01UF" CC0805_OV 120,15 r90 top
C103 "CAP_NP_CC0805_OV_DISCRETE_1.4732 MM_150-75010_0.01UF" CC0805_OV 209,1400 r90 top
C104 "CAP_NP_CC0603_OV_DISCRETE_1MM_150-79569_10UF" CC0603_OV#1 2960,1665 r270 top
C105 "CAP_NP_CC0603_OV_DISCRETE_1MM_150-79569_10UF" CC0603_OV#1 3020,1665 r270 top
C106 "CAP_NP_CC0402_25_DISCRETE_0.635MM_150-75182_0.1UF_10%" CC0402_25#1 785,1530 r270 bottom
D1 "LED_LED_1P1_1P1X0P6_SM_IC_0.5 MM_370-77428_RED LED" LED_1P1_1P1X0P6_SM 1660,1650 r90 top
D2 "LRTBR48G_4P_LED4_2P7X2P6_SM_IC_2.14MM_370-76899_RGB" LED4_2P7X2P6_SM 2657,1645 r270 top
D3 "DIODE_SCHTKY_SMB_2P7X1P4_IC_0.73MM_480-76978_MSS1P3L" SMB_2P7X1P4 404.94,1384.41 r180 top
D4 "DIODE_SCHTKY_SMB_2P7X1P4_IC_0.73MM_480-76978_MSS1P3L" SMB_2P7X1P4 379.94,269.41 r180 top
D5 "LED_LED_1X0P6_SM_IC_0.35MM_370-76900_YEL-GRN" LED_1X0P6_SM 2920,310 r270 top
D6 "DIODE_SCHTKY_SMB_2P7X1P4_IC_0.73MM_480-76978_MSS1P3L" SMB_2P7X1P4 1609.94,269.41 r180 top
D7 "DIODE_BIDIR_SOD882_IC_0.5 MM_480-78454_PESD5V0F1BL" SOD882 240,450 r0 top
D8 "DIODE_BIDIR_SOD882_IC_0.5 MM_480-78454_PESD5V0F1BL" SOD882 240,525 r0 top
D9 "DIODE_NUP2105L_SOT-23_IC_1.11MM_480-77157_NUP2105L" SOT-23 537,280 r0 top
D10 "LED_LED_1X0P6_SM_IC_0.35MM_370-76900_YEL-GRN" LED_1X0P6_SM 845,1665 r90 top
D11 "LED_LED_1P1_1P1X0P6_SM_IC_0.5 MM_370-77428_RED LED" LED_1P1_1P1X0P6_SM 1450,1005 r90 top
D12 "LED_LED_1X0P6_SM_IC_0.35MM_370-76900_YEL-GRN" LED_1X0P6_SM 895,1665 r90 top
D14 "DIODE_TVS_SOD523_IC_0.65MM_480-79814_PESD3V3S1UB" SOD523 1644.81,1375 r90 top
D15 "DIODE_TVS_SOD523_IC_0.65MM_480-79814_PESD3V3S1UB" SOD523 1784.81,1375 r90 top
D16 "DIODE_ARRAY_5CH_SOT-363_0P65_SMT_IC_1.1MM_480-79841_PESD3V3L5UY" SOT-363_0P65_SMT 1760,1040 r0 top
D17 "DUALDIODE_CC_SOT23_SHTKY_SOT23-40X40_IC_1.2MM_480-78365_BAT54C-7-F" SOT23-40X40 3000,317.96 r90 bottom
E1 "ELECTRODE_ELECTRODE_8MM_SQ_CIR_IC_0.1MM_510-78043_ELECTRODE_8MM*8MM" ELECTRODE_8MM_SQ_CIR 3285,70 r0 top
J1 "CONN_HDR_8X2_CON_2X8_SKT_100_TH_IO_8.75MM_210-81775_CON 2X8" CON_2X8_SKT_100_TH 1867.5,1870 r180 top
J2 "CONN_HDR_10X2_CON_SKT2X10_TH_IO_8.75MM_210-81776_CON 2X10" CON_SKT2X10_TH 910,1870 r270 top
J3 "CONN_HDR_8X2_CON_2X8_SKT_100_TH_IO_8.75MM_210-81775_CON 2X8" CON_2X8_SKT_100_TH 1165.5,70.5 r0 top
J4 "CONN_HDR_6X2_CON_SKT2X6_TH_126L_IO_8.75MM_210-81774_CON 2X6" CON_SKT2X6_TH_126L 1968.5,70.5 r180 top
J6 "USB16_TYPEC_4SH_CON16_USB_TYPE-C_RA_TH_IO_3.66 MM_210-82931_USB_TYPE_C" CON16_USB_TYPE-C_RA_TH -33.22,324.36 r270 top
J7 "CON_MICROSD_9P_4G_CON9_SDCARD_1P1_15P05X14P75_SM_IO_1.45 MM_211-83462_CON_SD_CARD_9" CON9_SDCARD_1P1_15P05X14P75_SM 3785,101.29 r0 bottom
J8 "CON_RJ45_1X8_YG_CON12P_1P02_16P48X15P5_RA_TH_IO_11.35 MM_210-83436_RJ45X2_LEDYG" CON12P_1P02_16P48X15P5_RA_TH 60.25,962.25 r270 top
J10 "CONN_HDR_2X2_HDR2X2_2P54_TH_IO_8.38 MM_210-83038_HDR 2X2" HDR2X2_2P54_TH 565.5,70.5 r0 top
J11 "CONN_HDR_16X2_CON_SKT_32F_100_TH_IO_8.75MM_210-83440_CON 2X16" CON_SKT_32F_100_TH 3215,1870 r270 top
J12 "CONN_HDR_14X2_CON_SKT2X14_TH_126L_IO_8.75MM_210-83442_CON 2X14" CON_SKT2X14_TH_126L 4320,965.24 r0 top
J13 "CONN_HDR_8X1_CON_1X8_SKT_2P54_TH_126L_IO_8.75MM_210-81617_SKT_1X8" CON_1X8_SKT_2P54_TH_126L 3490.02,620.05 r90 top
J14 "CONN_HDR_8X1_CON_1X8_SKT_2P54_TH_126L_IO_8.75MM_210-81617_SKT_1X8" CON_1X8_SKT_2P54_TH_126L 3490.02,1520.05 r90 top
J15 "CONN_HDR_3X1_HDR103_IO_8.59MM_210-75442_HDR_1X3" HDR103 1503.75,402.5 r90 top
J16 "CONN_HDR_6X2_SKT2X6_100_TH_RA_IO_5.28 MM_210-80998_PPPC062LJBN-RC" SKT2X6_100_TH_RA 2670,-74.04 r270 top
J17 "USB16_TYPEC_4SH_CON16_USB_TYPE-C_RA_TH_IO_3.66 MM_210-82931_USB_TYPE_C" CON16_USB_TYPE-C_RA_TH -33.22,1577 r270 top
J18 "CONN_HDR_2X1_HDR1X2_5P48X2P69_IO_8.69MM_210-80468_HDR1X2" HDR1X2_5P48X2P69#1 463,1645 r180 top
J19 "CONN_HDR_2X1_HDR1X2_5P48X2P69_IO_8.69MM_210-80468_HDR1X2" HDR1X2_5P48X2P69#1 463,1505 r180 top
J21 "CONN_HDR_2X1_HDR1X2_5P48X2P69_IO_8.69MM_210-80468_HDR1X2" HDR1X2_5P48X2P69#1 1270,1070 r180 top
J22 "CONN_HDR_2X1_HDR1X2_5P48X2P69_IO_8.69MM_210-80468_HDR1X2" HDR1X2_5P48X2P69#2 1005,1070 r0 top
J23 "CONN_HDR_5X2_HDR_5X2_FTSH_TH_IO_4.25MM_210-80192_HDR 2X5" HDR_5X2_FTSH_TH 1725,1215 r270 top
J24 "CONN_HDR_2X1_HDR1X2_5P48X2P69_IO_8.69MM_210-80468_HDR1X2" HDR1X2_5P48X2P69#1 2360,365 r270 top
J25 "CONN_HDR_2X1_HDR1X2_5P48X2P69_IO_8.69MM_210-80468_HDR1X2" HDR1X2_5P48X2P69#1 2560,365 r90 top
J26 "CONN_HDR_2X1_HDR1X2_5P48X2P69_IO_8.69MM_210-80468_HDR1X2" HDR1X2_5P48X2P69#1 2460,365 r90 top
J27 "CONN_HDR_2X1_HDR1X2_5P48X2P69_IO_8.69MM_210-80468_HDR1X2" HDR1X2_5P48X2P69#1 2660,365 r90 top
J28 "CONN_HDR_2X1_HDR1X2_5P48X2P69_IO_8.69MM_210-80468_HDR1X2" HDR1X2_5P48X2P69#1 2760,365 r90 top
JP1 "CONN_HDR_1X1_HDR101_IO_8.585 MM_210-75767_HDR 1X1" HDR101 -25,0 r90 top
JP2 "CONN_HDR_1X1_HDR101_IO_8.585 MM_210-75767_HDR 1X1" HDR101 3295,425 r90 top
JP6 "CONN_HDR_2X1_HDR1X2_5P48X2P69_IO_8.69MM_210-80468_HDR1X2" HDR1X2_5P48X2P69#2 2968,450 r0 top
L1 "INDUCTOR_FERRITE_IND_0402_DISCRETE_0.55MM_180-77771_120 OHM" IND_0402 2390,805 r90 bottom
L2 "INDUCTOR_IND_SPH2520_DISCRETE_1.2MM_180-78270_1.5UH" IND_SPH2520 2965,875 r0 top
L3 "BEAD_IND_1608_DISCRETE_0.95MM_180-78156_330 OHM_25%" IND_1608 250.05,270 r0 top
L5 "IND_IND_1608_DISCRETE_0.95MM_180-75495_100 OHM@100MHZ" IND_1608 1070.05,545 r0 top
L6 "BEAD_IND_1608_DISCRETE_0.95MM_180-78156_330 OHM_25%" IND_1608 240.05,1500 r0 top
L9 "INDUCTOR_IND_1P8X1MM_SM_DISCRETE_1MM_180-78469_600OHM" IND_1P8X1MM_SM 1334.7,1441.9 r270 top
L10 "INDUCTOR_IND_1P8X1MM_SM_DISCRETE_1MM_180-78469_600OHM" IND_1P8X1MM_SM 1130,1578 r270 top
L11 "INDUCTOR_IND_0805_DISCRETE_1MM_180-81632_4.7UH" IND_0805 725,1185 r180 top
L12 "INDUCTOR_IND_1P8X1MM_SM_DISCRETE_1MM_180-78469_600OHM" IND_1P8X1MM_SM 695,1120 r0 bottom
L13 "DLW43_IND4_CHOKE_0805_39H_DISCRETE_1MM_180-76336_90OHM" IND4_CHOKE_0805_39H 263.46,359.25 r0 top
MH1 "MOUNT_HOLE_MH125-160_IC_0.1 MM_510-75297_125" MH125-160 4380.24,1934 r0 top
MH2 "MOUNT_HOLE_MH125-160_IC_0.1 MM_510-75297_125" MH125-160 4380.24,6 r0 top
MH3 "MOUNT_HOLE_MH125-160_IC_0.1 MM_510-75297_125" MH125-160 305.5,30 r0 top
MH4 "MOUNT_HOLE_MH125-160_IC_0.1 MM_510-75297_125" MH125-160 257.5,1878 r0 top
Q1 "2SK3018_SOT323_3_IC_0.9MM_480-75317_2SK3018" SOT323_3 1660,710 r270 top
R1 "RES_RC0402_25_DISCRETE_0.40 MM_470-80452_10K_5%" RC0402_25#1 4110,250 r0 top
R2 "RES_RC0402_25_DISCRETE_0.40 MM_470-80452_10K_5%" RC0402_25#1 4085,1700 r270 top
R3 "RES_RC0402_25_DISCRETE_0.40 MM_470-80452_10K_5%" RC0402_25#2 -5,1930 r0 bottom
R4 "RES_RC0402_25_DISCRETE_0.45MM_470-30315_470_1%" RC0402_25#2 -5,1970 r0 bottom
R5 "RES_RC0402_25_DISCRETE_0.45MM_470-30315_470_1%" RC0402_25#1 2660,1450 r270 top
R6 "RES_RC0402_25_DISCRETE_0.45MM_470-30315_470_1%" RC0402_25#1 2625,1450 r270 top
R7 "RES_RC0402_25_DISCRETE_0.45MM_470-30315_470_1%" RC0402_25#1 2460,1505 r270 top
R8 "RES_RC0603_OV_DISCRETE_0.6MM_470-80866_0" RC0603_OV#1 2295,893 r90 bottom
R9 "RES_RC0603_OV_DISCRETE_0.6MM_470-80866_0" RC0603_OV#1 3015,1140 r270 bottom
R10 "RES_RC0603_OV_DISCRETE_0.6MM_470-80866_0" RC0603_OV#1 2295,805 r0 bottom
R11 "RES_RC0603_OV_DISCRETE_0.6MM_470-80866_0" RC0603_OV#1 2465,1165 r0 bottom
R12 "RES_RC0603_OV_DISCRETE_0.6MM_470-80866_0" RC0603_OV#2 2710,765 r0 bottom
R14 "RES_RC0603_OV_DISCRETE_0.6MM_470-80866_0" RC0603_OV#1 3060,885 r270 bottom
R15 "RES_RC0603_OV_DISCRETE_0.6MM_470-80866_0" RC0603_OV#1 2960,675 r90 top
R16 "RES_RC0603_OV_DISCRETE_0.6MM_470-80866_0" RC0603_OV#1 2880,320 r90 bottom
R17 "RES_RC0603_OV_DISCRETE_0.6MM_470-80866_0" RC0603_OV#1 2985,885 r90 bottom
R18 "RES_RC0603_OV_DISCRETE_0.6MM_470-80866_0" RC0603_OV#1 3115,865 r0 top
R19 "RES_RC0603_OV_DISCRETE_0.6MM_470-80866_0" RC0603_OV#2 3195,885 r0 bottom
R20 "RES_RC0603_OV_DISCRETE_0.6MM_470-80866_0" RC0603_OV#1 3235,865 r0 top
R21 "RES_RC0402_25_DISCRETE_0.40 MM_470-80452_10K_5%" RC0402_25#1 2935,860 r270 bottom
R22 "RES_RC0603_OV_DISCRETE_0.6MM_470-80866_0" RC0603_OV#1 3235,940 r180 top
R23 "RES_RC0603_OV_DISCRETE_0.6MM_470-80866_0" RC0603_OV#1 3070,960 r90 top
R24 "RES_RC0402_25_DISCRETE_0.45MM_470-30315_470_1%" RC0402_25#1 2090,275 r270 top
R25 "RES_RC0603_OV_DISCRETE_0.6MM_470-80866_0" RC0603_OV#1 2080,375 r270 top
R26 "RES_RC0402_25_DISCRETE_0.40 MM_470-80452_10K" RC0402_25#1 1855,705 r270 top
R27 "RES_RC0402_25_DISCRETE_0.40 MM_470-80452_10K_5%" RC0402_25#1 1985,550 r0 top
R28 "RES_RC0603_OV_DISCRETE_0.6MM_470-80866_0" RC0603_OV#1 1905,720 r270 top
R29 "RES_RC0402_25_DISCRETE_0.4MM_470-76103_20K" RC0402_25#1 1985,585 r180 top
R32 "RES_RC0402_25_DISCRETE_0.41MM_470-75626_4.7K" RC0402_25#1 1815,705 r270 top
R33 "RES_RC0402_25_DISCRETE_0.4MM_470-76240_100K" RC0402_25#1 1920,605 r270 top
R34 "RES_RC0603_OV_DISCRETE_0.6MM_470-80866_0" RC0603_OV#1 1765,720 r270 top
R35 "RES_RC0805_OV_DISCRETE_0.55MM_470-76691_1M" RC0805_OV#1 715,415 r270 bottom
R36 "RES_RC0402_25_DISCRETE_0.40 MM_470-80452_10K" RC0402_25#1 880,330 r90 top
R37 "RES_RC0402_25_DISCRETE_0.40 MM_470-80452_10K_5%" RC0402_25#1 840,405 r0 bottom
R38 "RES_RC0402_25_DISCRETE_0.40 MM_470-80452_10K_5%" RC0402_25#1 915,330 r90 top
R39 "RES_RC0402_25_DISCRETE_0.40 MM_470-80452_10K" RC0402_25#1 830,520 r0 top
R40 "RES_RC0402_25_DISCRETE_0.40 MM_470-80452_10K_5%" RC0402_25#1 845,330 r90 top
R41 "RES_RC0402_25_DISCRETE_0.40 MM_470-80452_10K" RC0402_25#1 755,520 r0 top
R42 "RES_RC0402_25_DISCRETE_0.40 MM_470-80452_10K_5%" RC0402_25#1 705,330 r90 top
R43 "RES_RC0402_25_DISCRETE_0.45 MM_470-75394_0" RC0402_25#1 935,460 r180 top
R44 "RES_RC0603_OV_DISCRETE_0.6MM_470-80866_0" RC0603_OV#1 925,510 r0 top
R45 "RES_RC0402_25_DISCRETE_0.45 MM_470-75394_0" RC0402_25#1 935,415 r180 top
R46 "RES_RC0402_25_DISCRETE_0.45 MM_470-75394_0" RC0402_25#1 880,330 r90 bottom
R47 "RES_RC0402_25_DISCRETE_0.45 MM_470-75394_0" RC0402_25#1 320,420 r0 top
R48 "RES_RC0402_25_DISCRETE_0.45 MM_470-75394_0" RC0402_25#1 320,465 r0 top
R49 "RES_RC0402_25_DISCRETE_0.40 MM_470-80452_10K_5%" RC0402_25#1 810,330 r270 top
R50 "RES_RC0402_25_DISCRETE_0.40 MM_470-80452_10K_5%" RC0402_25#1 740,330 r270 top
R51 "RES_RC0402_25_DISCRETE_0.41MM_470-75626_4.7K" RC0402_25#1 3615,795 r90 top
R52 "RES_RC0402_25_DISCRETE_0.41MM_470-75626_4.7K" RC0402_25#1 3680,885 r0 top
R53 "RES_RC0402_25_DISCRETE_0.4MM_470-76037_1.0K" RC0402_25#1 3680,920 r180 top
R54 "RES_RC0402_25_DISCRETE_0.4MM_470-76240_100K" RC0402_25#1 3615,490 r180 top
R55 "RES_RC0603_OV_DISCRETE_0.6MM_470-80866_0" RC0603_OV#1 3690,835 r0 top
R56 "RES_RC0603_OV_DISCRETE_0.6MM_470-80866_0" RC0603_OV#1 3690,775 r0 top
R57 "RES_RC0402_25_DISCRETE_0.40 MM_470-80452_10K" RC0402_25#1 3995,490 r0 top
R58 "RES_RC0402_25_DISCRETE_0.40 MM_470-80452_10K_1%" RC0402_25#1 3960,1070 r0 bottom
R59 "RES_RC0402_25_DISCRETE_0.40 MM_470-80452_10K_1%" RC0402_25#1 4000,1270 r0 bottom
R60 "RES_RC0402_25_DISCRETE_0.40 MM_470-80452_10K_1%" RC0402_25#1 3780,1165 r270 bottom
R61 "RES_RC0603_OV_DISCRETE_0.6MM_470-80866_0" RC0603_OV#1 3900,1345 r0 bottom
R62 "RES_RC0402_25_DISCRETE_0.4MM_470-75360_49.9" RC0402_25#1 985,775 r90 top
R63 "RES_RC0402_25_DISCRETE_0.4MM_470-75360_49.9" RC0402_25#1 985,850 r270 top
R64 "RES_RC0402_25_DISCRETE_0.4MM_470-75360_49.9" RC0402_25#1 985,625 r90 top
R65 "RES_RC0402_25_DISCRETE_0.4MM_470-75360_49.9" RC0402_25#1 985,700 r270 top
R66 "RES_RC0402_25_DISCRETE_0.45MM_470-30315_470_1%" RC0402_25#1 475,1240 r0 bottom
R67 "RES_RC0402_25_DISCRETE_0.41MM_470-75626_4.7K" RC0402_25#1 1105,940 r90 top
R68 "RES_RC0402_25_DISCRETE_0.41MM_470-75626_4.7K" RC0402_25#1 1055,940 r90 top
R69 "RES_RC0402_25_DISCRETE_0.45MM_470-30315_470_1%" RC0402_25#1 475,665 r0 bottom
R70 "RES_RC0402_25_DISCRETE_0.4MM_470-75790_33" RC0402_25#1 1410,730 r180 top
R71 "RES_RC0402_25_DISCRETE_0.4MM_470-75790_33" RC0402_25#1 1150,940 r270 top
R72 "RES_RC0402_25_DISCRETE_0.40 MM_470-30729_75" RC0402_25#1 475,1040 r0 bottom
R73 "RES_RC0402_25_DISCRETE_0.4MM_470-75360_49.9" RC0402_25#1 475,1080 r0 bottom
R74 "RES_RC0402_25_DISCRETE_0.40 MM_470-30729_75" RC0402_25#1 475,710 r0 bottom
R75 "RES_RC0402_25_DISCRETE_0.4MM_470-75790_33" RC0402_25#1 1410,836 r180 top
R76 "RES_RC0402_25_DISCRETE_0.4MM_470-75360_49.9" RC0402_25#1 475,1205 r0 bottom
R77 "RES_RC0402_25_DISCRETE_0.4MM_470-75360_49.9" RC0402_25#1 475,1160 r0 bottom
R78 "RES_RC0402_25_DISCRETE_0.4MM_470-75360_49.9" RC0402_25#1 475,1120 r0 bottom
R79 "RES_RC0402_25_DISCRETE_0.4MM_470-75790_33" RC0402_25#1 1410,695 r180 top
R80 "RES_RC0402_25_DISCRETE_0.4MM_470-75790_33" RC0402_25#1 1410,655 r180 top
R81 "RES_RC0402_25_DISCRETE_0.4MM_470-75790_33" RC0402_25#1 1220,545 r270 top
R82 "RES_RC0805_OV_DISCRETE_0.55MM_470-76691_1M" RC0805_OV#1 335,505 r270 bottom
R83 "RES_RC0402_25_DISCRETE_0.4MM_470-75360_49.9" RC0402_25#1 550,1160 r0 bottom
R84 "RES_RC0402_25_DISCRETE_0.4MM_470-75360_49.9" RC0402_25#1 550,1120 r0 bottom
R85 "RES_RC0603_OV_DISCRETE_0.6MM_470-80866_0" RC0603_OV#1 1325,570 r0 bottom
R86 "RES_RC0402_25_DISCRETE_0.40 MM_470-80452_10K" RC0402_25#2 1275,830 r0 bottom
R87 "RES_RC0402_25_DISCRETE_0.4 MM_470-76098_12.1K" RC0402_25#1 1020,625 r270 top
R88 "RES_RC0402_25_DISCRETE_0.41MM_470-75626_4.7K" RC0402_25#2 1410,695 r0 bottom
R89 "RES_RC0402_25_DISCRETE_0.41MM_470-75626_4.7K" RC0402_25#2 1410,836 r0 bottom
R90 "RES_RC0402_25_DISCRETE_0.41MM_470-75626_4.7K" RC0402_25#2 1410,655 r0 bottom
R91 "RES_RC0402_25_DISCRETE_0.41MM_470-75626_4.7K" RC0402_25#1 1410,730 r0 bottom
R92 "RES_RC0402_25_DISCRETE_0.41MM_470-75626_4.7K" RC0402_25#1 1300,545 r90 top
R93 "RES_RC0402_25_DISCRETE_0.41MM_470-75626_4.7K" RC0402_25#1 1260,545 r90 top
R94 "RES_RC0402_25_DISCRETE_0.41MM_470-75626_4.7K" RC0402_25#1 1410,615 r180 top
R95 "RES_RC0402_25_DISCRETE_0.41MM_470-75626_4.7K" RC0402_25#1 1180,545 r90 top
R96 "RES_RC0402_25_DISCRETE_0.41MM_470-75626_4.7K" RC0402_25#1 1140,545 r90 top
R97 "RES_RC0402_25_DISCRETE_0.40 MM_470-80452_10K_5%" RC0402_25#1 1645,855 r270 top
R98 "RES_RC0805_OV_DISCRETE_0.60 MM_470-83214_62" RC0805_OV#2 460,240 r0 bottom
R100 "RES_RC0603_OV_DISCRETE_0.6MM_470-80866_0" RC0603_OV#1 505,415 r270 bottom
R101 "RES_RC0603_OV_DISCRETE_0.6MM_470-80866_0" RC0603_OV#1 570,415 r270 bottom
R102 "RES_RC0805_OV_DISCRETE_0.60 MM_470-83214_62" RC0805_OV#2 610,240 r0 bottom
R103 "RES_RC0402_25_DISCRETE_0.4MM_470-76240_100K" RC0402_25#1 1590,855 r90 top
R106 "RES_RC0402_25_DISCRETE_0.40 MM_470-80452_10K_5%" RC0402_25#1 624.7,1351.9 r270 top
R107 "RES_RC0402_25_DISCRETE_0.4MM_470-76103_20K" RC0402_25#1 664.7,1351.9 r90 top
R108 "RES_RC0402_25_DISCRETE_0.45MM_470-30315_470_1%" RC0402_25#1 775,1650 r0 top
R109 "RES_RC0402_25_DISCRETE_0.45MM_470-30315_470_1%" RC0402_25#1 1450,1090 r270 top
R110 "RES_RC0402_25_DISCRETE_0.45 MM_470-75394_0" RC0402_25#1 235,1590 r0 top
R111 "RES_RC0402_25_DISCRETE_0.45 MM_470-75394_0" RC0402_25#1 235,1625 r0 top
R112 "RES_RC0402_25_DISCRETE_0.4MM_470-76474_5.1K" RC0402_25#1 235,1660 r0 top
R113 "RES_RC0402_25_DISCRETE_0.4MM_470-76474_5.1K" RC0402_25#1 235,1550 r0 top
R114 "RES_RC0402_25_DISCRETE_0.45MM_470-30315_470_1%" RC0402_25#1 775,1690 r0 top
R116 "RES_RC0402_25_DISCRETE_0.40 MM_470-80452_10K_5%" RC0402_25#1 835,1570 r90 top
R117 "RES_RC0402_25_DISCRETE_0.4MM_470-76037_1.0K" RC0402_25#1 820,1130 r180 top
R118 "RES_RC0402_25_DISCRETE_0.4MM_470-76037_1.0K" RC0402_25#1 1234.7,1316.9 r0 top
R119 "RES_RC0402_25_DISCRETE_0.4MM_470-76037_1.0K" RC0402_25#1 1234.7,1396.9 r0 top
R120 "RES_RC0402_25_DISCRETE_0.4MM_470-76037_1.0K" RC0402_25#1 1234.7,1486.9 r0 top
R121 "RES_RC0402_25_DISCRETE_0.4MM_470-76037_1.0K" RC0402_25#2 925,1310 r0 bottom
R122 "RES_RC0402_25_DISCRETE_0.4MM_470-76037_1.0K" RC0402_25#1 744.7,1376.9 r180 top
R123 "RES_RC0402_25_DISCRETE_0.4MM_470-76037_1.0K" RC0402_25#1 940,1570 r90 top
R124 "RES_RC0402_25_DISCRETE_0.4MM_470-76240_100K" RC0402_25#2 1240,1160 r0 bottom
R129 "RES_RC0402_25_DISCRETE_0.45 MM_470-75394_0" RC0402_25#1 1235,1280 r0 top
R130 "RES_RC0402_25_DISCRETE_0.45 MM_470-75394_0" RC0402_25#1 1340,1525 r0 top
R131 "RES_RC0402_25_DISCRETE_0.45 MM_470-75394_0" RC0402_25#1 1235,1605 r0 top
R132 "RES_RC0402_25_DISCRETE_0.45 MM_470-75394_0" RC0402_25#1 1235,1565 r0 top
R133 "RES_RC0402_25_DISCRETE_0.45 MM_470-75394_0" RC0402_25#1 1430,1225 r0 top
R134 "RES_RC0402_25_DISCRETE_0.4MM_470-75356_2.0K" RC0402_25#1 1730,1360 r270 top
R135 "RES_RC0402_25_DISCRETE_0.4 MM_470-83213_2.2K" RC0402_25#1 1695,1360 r90 top
R136 "RES_RC0402_25_DISCRETE_0.45 MM_470-75394_0" RC0402_25#1 1360,1300 r0 top
R137 "RES_RC0402_25_DISCRETE_0.45 MM_470-75394_0" RC0402_25#1 1430,1265 r0 top
R138 "RES_RC0402_25_DISCRETE_0.45 MM_470-75394_0" RC0402_25#1 1430,1145 r0 top
R139 "RES_RC0402_25_DISCRETE_0.45 MM_470-75394_0" RC0402_25#1 1430,1185 r0 top
R140 "RES_RC0402_25_DISCRETE_0.4 MM_470-83213_2.2K" RC0402_25#1 1335,1230 r180 top
R141 "RES_RC0402_25_DISCRETE_0.4 MM_470-83213_2.2K" RC0402_25#1 1340,1565 r180 top
R142 "RES_RC0402_25_DISCRETE_0.45 MM_470-75394_0" RC0402_25#1 1235,1525 r0 top
R143 "RES_RC0402_25_DISCRETE_0.45 MM_470-75394_0" RC0402_25#1 1235,1230 r0 top
R144 "RES_RC0402_25_DISCRETE_0.4MM_470-76240_100K" RC0402_25#1 1860,1070 r270 top
R145 "RES_RC0402_25_DISCRETE_0.4MM_470-76240_100K" RC0402_25#1 1640,1015 r0 top
R146 "RES_RC0402_25_DISCRETE_0.4MM_470-76240_100K" RC0402_25#1 1640,1065 r0 top
R147 "RES_RC0402_25_DISCRETE_0.4MM_470-76240_100K" RC0402_25#1 1860,995 r270 top
R148 "RES_RC0402_25_DISCRETE_0.41MM_470-75626_4.7K" RC0402_25#1 915,440 r0 bottom
R149 "RES_RC0402_25_DISCRETE_0.41MM_470-75626_4.7K" RC0402_25#1 915,485 r0 bottom
R151 "RES_RC0603_OV_DISCRETE_0.6MM_470-80866_0" RC0603_OV#1 2570,535 r0 top
R152 "RES_RC0603_OV_DISCRETE_0.6MM_470-80866_0" RC0603_OV#1 2455,535 r180 top
R153 "RES_RC0603_OV_DISCRETE_0.6MM_470-80866_0" RC0603_OV#1 805,685 r90 bottom
R154 "RES_RC0603_OV_DISCRETE_0.6MM_470-80866_0" RC0603_OV#1 1046,391 r90 top
R155 "RES_RC0402_25_DISCRETE_0.4MM_470-80487_1.5K" RC0402_25#1 1410,875 r180 top
R156 "RES_RC0603_OV_DISCRETE_0.6MM_470-80866_0" RC0603_OV#1 3410,340 r90 top
R157 "RES_RC0603_OV_DISCRETE_0.6MM_470-80866_0" RC0603_OV#1 1990,1145 r0 bottom
R158 "RES_RC0603_OV_DISCRETE_0.6MM_470-80866_0" RC0603_OV#1 1985,1030 r0 bottom
R159 "RES_RC0603_OV_DISCRETE_0.6MM_470-80866_0" RC0603_OV#2 1600,925 r0 bottom
R160 "RES_RC0603_OV_DISCRETE_0.6MM_470-80866_0" RC0603_OV#1 1450,1025 r0 bottom
R161 "RES_RC0603_OV_DISCRETE_0.6MM_470-80866_0" RC0603_OV#1 1325,925 r0 bottom
R162 "RES_RC0603_OV_DISCRETE_0.6MM_470-80866_0" RC0603_OV#1 1140,940 r0 bottom
R163 "RES_RC0603_OV_DISCRETE_0.6MM_470-80866_0" RC0603_OV#1 1990,1225 r0 bottom
R164 "RES_RC0603_OV_DISCRETE_0.6MM_470-80866_0" RC0603_OV#1 2170,1230 r0 bottom
R165 "RES_RC0603_OV_DISCRETE_0.6MM_470-80866_0" RC0603_OV#1 1785,1025 r0 bottom
R166 "RES_RC0603_OV_DISCRETE_0.6MM_470-80866_0" RC0603_OV#1 1985,932 r0 bottom
R167 "RES_RC0402_25_DISCRETE_0.45 MM_470-75394_0" RC0402_25#2 2345,1485 r0 bottom
R168 "RES_RC0603_OV_DISCRETE_0.6MM_470-80866_0" RC0603_OV#1 4085,1665 r0 bottom
R169 "RES_RC0402_25_DISCRETE_0.45 MM_470-75394_0" RC0402_25#1 2915,1458.6 r90 top
R171 "RES_RC0603_OV_DISCRETE_0.6MM_470-80866_0" RC0603_OV#1 2440,800 r270 bottom
R172 "RES_RC0603_OV_DISCRETE_0.6MM_470-75451_330" RC0603_OV#1 1450,1155 r0 bottom
R173 "RES_RC0603_OV_DISCRETE_0.6MM_470-75451_330" RC0603_OV#1 1475,1320 r0 bottom
R178 "RES_RC0603_OV_DISCRETE_0.6MM_470-75451_330" RC0603_OV#1 1450,1235 r0 bottom
R179 "RES_RC0603_OV_DISCRETE_0.6MM_470-75451_330" RC0603_OV#1 1475,1390 r0 bottom
R180 "RES_3PIN_R603-X2_DISCRETE_0.6MM_470-80866_0" R603-X2 1915,360 r270 bottom
R181 "RES_3PIN_R603-X2_DISCRETE_0.6MM_470-80866_0" R603-X2 1915,560 r270 bottom
R182 "RES_3PIN_R603-X2_DISCRETE_0.6MM_470-80866_0" R603-X2 2030,360 r270 bottom
R183 "RES_3PIN_R603-X2_DISCRETE_0.6MM_470-80866_0" R603-X2 2030,560 r270 bottom
R186 "RES_3PIN_R603-X2_DISCRETE_0.6MM_470-80866_0" R603-X2 1810,360 r270 bottom
R187 "RES_3PIN_R603-X2_DISCRETE_0.6MM_470-80866_0" R603-X2 1810,560 r270 bottom
R188 "RES_RC0402_25_DISCRETE_0.45MM_470-75591_100" RC0402_25#1 1835,1370 r270 top
R189 "RES_RC0402_25_DISCRETE_0.45MM_470-75591_100" RC0402_25#1 905,1570 r90 top
R190 "RES_RC0603_OV_DISCRETE_0.6MM_470-80866_0" RC0603_OV#1 1415,545 r0 top
R191 "RES_RC0603_OV_DISCRETE_0.6MM_470-80866_0" RC0603_OV#1 1415,930 r180 top
R192 "RES_RC0805_OV_DISCRETE_0.55MM_470-76691_1M" RC0805_OV#1 245,505 r90 bottom
R193 "RES_RC0805_OV_DISCRETE_0.55MM_470-76691_1M" RC0805_OV#1 235,1720 r180 top
R194 "RES_RC0603_OV_DISCRETE_0.6MM_470-80866_0" RC0603_OV#1 2885,885 r270 bottom
R195 "RES_3PIN_R603-X2_DISCRETE_0.6MM_470-80866_0" R603-X2 1665,1449 r0 bottom
R196 "RES_3PIN_R603-X2_DISCRETE_0.6MM_470-80866_0" R603-X2 1165,1565 r0 bottom
R197 "RES_3PIN_R603-X2_DISCRETE_0.6MM_470-80866_0" R603-X2 3785,1666 r0 bottom
R198 "RES_RC0402_25_DISCRETE_0.45 MM_470-75394_0" RC0402_25#1 1700,965 r0 top
R199 "RES_RC0402_25_DISCRETE_0.45 MM_470-75394_0" RC0402_25#1 1820,870 r0 bottom
R200 "RES_RC0402_25_DISCRETE_0.45 MM_470-75394_0" RC0402_25#2 4040,1045 r0 bottom
R201 "RES_RC0402_25_DISCRETE_0.45 MM_470-75394_0" RC0402_25#1 4040,960 r270 top
R202 "RES_RC0402_25_DISCRETE_0.45 MM_470-75394_0" RC0402_25#1 4080,490 r180 top
R203 "RES_RC0402_25_DISCRETE_0.45 MM_470-75394_0" RC0402_25#1 785,285 r90 bottom
R204 "RES_RC0402_25_DISCRETE_0.4MM_470-75356_2.0K" RC0402_25#1 765,1585 r0 bottom
R205 "RES_RC0402_25_DISCRETE_0.4MM_470-75356_2.0K" RC0402_25#1 825,1530 r270 bottom
SJ1 "RES_3PIN_3PIN_0402_SOLDER_BLOB_JUMPER_SHORT_PSP_A_DISCRETE_0.1016MM_470-83095_3 PIN 0402 JUMPER" 3PIN_0402_SOLDER_BLOB_JUMPER_SHORT_PSP_A#1 2225,1001 r0 bottom
SJ2 "RES_3PIN_3PIN_0402_SOLDER_BLOB_JUMPER_SHORT_PSP_A_DISCRETE_0.1016MM_470-83095_3 PIN 0402 JUMPER" 3PIN_0402_SOLDER_BLOB_JUMPER_SHORT_PSP_A#1 1910,1610 r0 bottom
SJ3 "RES_3PIN_3PIN_0402_SOLDER_BLOB_JUMPER_SHORT_PSP_A_DISCRETE_0.1016MM_470-83095_3 PIN 0402 JUMPER" 3PIN_0402_SOLDER_BLOB_JUMPER_SHORT_PSP_A#1 1948,864 r0 bottom
SJ4 "RES_3PIN_3PIN_0402_SOLDER_BLOB_JUMPER_SHORT_PSP_A_DISCRETE_0.1016MM_470-83095_3 PIN 0402 JUMPER" 3PIN_0402_SOLDER_BLOB_JUMPER_SHORT_PSP_A#2 4075,1130 r90 bottom
SJ5 "RES_3PIN_3PIN_0402_SOLDER_BLOB_JUMPER_SHORT_PSP_A_DISCRETE_0.1016MM_470-83095_3 PIN 0402 JUMPER" 3PIN_0402_SOLDER_BLOB_JUMPER_SHORT_PSP_A#1 3965,1665 r0 bottom
SJ6 "RES_3PIN_3PIN_0402_SOLDER_BLOB_JUMPER_SHORT_PSP_A_DISCRETE_0.1016MM_470-83095_3 PIN 0402 JUMPER" 3PIN_0402_SOLDER_BLOB_JUMPER_SHORT_PSP_A#1 1440,1500 r0 bottom
SJ7 "RES_3PIN_3PIN_0402_SOLDER_BLOB_JUMPER_SHORT_PSP_A_DISCRETE_0.1016MM_470-83095_3 PIN 0402 JUMPER" 3PIN_0402_SOLDER_BLOB_JUMPER_SHORT_PSP_A#1 1485,1620 r0 bottom
SJ8 "RES_3PIN_3PIN_0402_SOLDER_BLOB_JUMPER_SHORT_PSP_A_DISCRETE_0.1016MM_470-83095_3 PIN 0402 JUMPER" 3PIN_0402_SOLDER_BLOB_JUMPER_SHORT_PSP_A#2 1174,249 r0 bottom
SJ9 "RES_3PIN_3PIN_0402_SOLDER_BLOB_JUMPER_SHORT_PSP_A_DISCRETE_0.1016MM_470-83095_3 PIN 0402 JUMPER" 3PIN_0402_SOLDER_BLOB_JUMPER_SHORT_PSP_A#2 955,255 r0 bottom
SJ10 "RES_3PIN_3PIN_0402_SOLDER_BLOB_JUMPER_SHORT_PSP_A_DISCRETE_0.1016MM_470-83095_3 PIN 0402 JUMPER" 3PIN_0402_SOLDER_BLOB_JUMPER_SHORT_PSP_A#1 2105,1550 r0 bottom
SJ11 "RES_3PIN_3PIN_0402_SOLDER_BLOB_JUMPER_SHORT_PSP_A_DISCRETE_0.1016MM_470-83095_3 PIN 0402 JUMPER" 3PIN_0402_SOLDER_BLOB_JUMPER_SHORT_PSP_A#1 2265,1585 r0 bottom
SJ12 "RES_3PIN_3PIN_0402_SOLDER_BLOB_JUMPER_SHORT_PSP_A_DISCRETE_0.1016MM_470-83095_3 PIN 0402 JUMPER" 3PIN_0402_SOLDER_BLOB_JUMPER_SHORT_PSP_A#2 3138,425 r270 bottom
SJ13 "RES_3PIN_3PIN_0402_SOLDER_BLOB_JUMPER_SHORT_PSP_A_DISCRETE_0.1016MM_470-83095_3 PIN 0402 JUMPER" 3PIN_0402_SOLDER_BLOB_JUMPER_SHORT_PSP_A#2 3197,425 r270 bottom
SW1 "SW_PSHBT_SPST_2_SW4_4P15_4P2X3P2_SM_IC_2.60 MM_510-78653_SW SPST NO" SW4_4P15_4P2X3P2_SM 4185,42.64 r270 top
SW2 "SW_PSHBT_SPST_2_SW4_4P15_4P2X3P2_SM_IC_2.60 MM_510-78653_SW SPST NO" SW4_4P15_4P2X3P2_SM 4180,1887.36 r90 top
SW3 "SW_PSHBT_SPST_2_SW4_4P15_4P2X3P2_SM_IC_2.60 MM_510-78653_SW SPST NO" SW4_4P15_4P2X3P2_SM 55,1917.64 r270 top
T1 "SM13072APEL_XFMR16P_XFMR16_1P27_13P05X7P15_IC_5.90 MM_560-77654_PT61018PEL" XFMR16_1P27_13P05X7P15 640,835 r270 top
TP1 "TESTLOOP_TPAD_030_IO_0.1MM_211-76642_TPAD_030" TPAD_030 2500,850 r0 bottom
TP2 "TESTLOOP_TPAD_030_IO_0.1MM_211-76642_TPAD_030" TPAD_030 2710,575 r0 top
TP3 "TESTLOOP_TPAD_030_IO_0.1MM_211-76642_TPAD_030" TPAD_030 2710,635 r0 top
TP4 "TESTLOOP_TPAD_030_IO_0.1MM_211-76642_TPAD_030" TPAD_030 3865,425 r270 top
TP5 "TESTLOOP_TPAD_030_IO_0.1MM_211-76642_TPAD_030" TPAD_030 3940,425 r270 top
TP6 "TESTLOOP_TPAD_030_IO_0.1MM_211-76642_TPAD_030" TPAD_030 3855,910 r270 top
TP7 "TESTLOOP_TPAD_030_IO_0.1MM_211-76642_TPAD_030" TPAD_030 4105,1145 r0 top
TP8 "TESTLOOP_TPAD_030_IO_0.1MM_211-76642_TPAD_030" TPAD_030 3980,990 r180 top
TP9 "TESTLOOP_TPAD_030_IO_0.1MM_211-76642_TPAD_030" TPAD_030 3655,990 r270 top
TP10 "TESTLOOP_TPAD_030_IO_0.1MM_211-76642_TPAD_030" TPAD_030 3785,990 r270 top
TP11 "TESTLOOP_TPAD_030_IO_0.1MM_211-76642_TPAD_030" TPAD_030 3915,990 r270 top
TP12 "TESTLOOP_TPAD_030_IO_0.1MM_211-76642_TPAD_030" TPAD_030 3850,990 r0 top
TP13 "TESTLOOP_TPAD_030_IO_0.1MM_211-76642_TPAD_030" TPAD_030 4105,1230 r0 top
TP14 "TESTLOOP_TPAD_030_IO_0.1MM_211-76642_TPAD_030" TPAD_030 3610,1130 r0 top
TP15 "TESTLOOP_TPAD_030_IO_0.1MM_211-76642_TPAD_030" TPAD_030 3720,990 r0 top
TP16 "TESTLOOP_TPAD_030_IO_0.1MM_211-76642_TPAD_030" TPAD_030 3610,1285 r180 top
TP17 "TESTLOOP_TPAD_030_IO_0.1MM_211-76642_TPAD_030" TPAD_030 4105,1055 r180 top
TP18 "TESTLOOP_TPAD_030_IO_0.1MM_211-76642_TPAD_030" TPAD_030 3610,1205 r0 top
TP19 "TESTLOOP_TPAD_030_IO_0.1MM_211-76642_TPAD_030" TPAD_030 1305,930 r0 top
TP20 "TESTLOOP_TPAD_030_IO_0.1MM_211-76642_TPAD_030" TPAD_030 1230,930 r0 top
TP21 "TESTLOOP_TPAD_030_IO_0.1MM_211-76642_TPAD_030" TPAD_030 1405,783 r0 top
TP22 "TESTLOOP_TPAD_030_IO_0.1MM_211-76642_TPAD_030" TPAD_030 995,930 r0 top
TP23 "TESTLOOP_TPAD_030_IO_0.1MM_211-76642_TPAD_030" TPAD_030 3560,425 r270 top
TP24 "TESTLOOP_TPAD_030_IO_0.1MM_211-76642_TPAD_030" TPAD_030 3635,425 r270 top
TP25 "TESTLOOP_TPAD_030_IO_0.1MM_211-76642_TPAD_030" TPAD_030 3710,425 r270 top
TP26 "TESTLOOP_TPAD_030_IO_0.1MM_211-76642_TPAD_030" TPAD_030 3790,425 r270 top
TP27 "TESTLOOP_TPAD_030_IO_0.1MM_211-76642_TPAD_030" TPAD_030 4015,425 r90 top
TP28 "TESTLOOP_TPAD_030_IO_0.1MM_211-76642_TPAD_030" TPAD_030 1075,1675 r0 top
TP29 "TESTLOOP_TPAD_030_IO_0.1MM_211-76642_TPAD_030" TPAD_030 1010,1675 r0 top
TP30 "TESTLOOP_TPAD_030_IO_0.1MM_211-76642_TPAD_030" TPAD_030 1145,1676 r0 top
TP31 "TESTLOOP_TPAD_030_IO_0.1MM_211-76642_TPAD_030" TPAD_030 3755,910 r0 top
U1 "MCXN947VDFT_BGA_184P_BGA184_0P5_9X9_SM_IC_0.98 MM_TMP-CIP-10342_MCXN947VDFT" BGA184_0P5_9X9_SM 2635,1020 r0 top
U2 "XC6227C_5P_SOT89-5_IC_1.6MM_315-80827_XC6227C331PR-G" SOT89-5 1795,340 r270 top
U3 "NX5P3090UK_WLCSP12_WLCSP12_0P4_1P38X1P68MM_SMDP_IC_0.565 MM_312-81574_NX5P3090UK" WLCSP12_0P4_1P38X1P68MM_SMDP 1835,600 r0 top
U4 "RCLAMP1654P_NEW_SLP1616P6_IC_0.65MM_480-78843_RCLAMP0854P.TCT" SLP1616P6 255,370 r90 bottom
U5 "PTN5150A_X2QFN12_X2QFN12_0P4_1P6X1P6_IC_0.4MM_312-81473_PTN5150A" X2QFN12_0P4_1P6X1P6 800,430 r0 top
U6 "P3T2175DP_TSSOP8_TSSOP8_A_IC_1.1MM_TMP-CIP-12137_P3T1755DP" TSSOP8_A 3880,795 r0 top
U7 "MT35XL512ABA1G12_PBGA24_1_6X8MM_IC_1.2MM_342-00726_MT35XL512ABA1G12" PBGA24_1_6X8MM 3870,1210 r0 top
U8 "W25Q64JV_SOIC_8P_B_SO8_W_IC_2.16MM_342-00710_W25Q64JVSSIQ" SO8_W 3870,1210 r180 top
U9 "LAN8710_QFN32EP_IC_1 MM_312-83484_LAN8741A-EN" QFN32EP 1210,740 r90 top
U10 "TJA1051TK_3_HVSON8_SON8_0P65_3P15X3P15_IC_1 MM_312-83230_TJA1057GTK/3Z" SON8_0P65_3P15X3P15 1775,875 r180 top
U11 "NIOBE4_MINI_FBGA98_BGA98_0P5_7X7_IC_0.97 MM_344-02410_LPC55S69JEV98" BGA98_0P5_7X7 989.7,1341.9 r270 top
U12 "RCLAMP1654P_NEW_SLP1616P6_IC_0.65MM_480-78843_RCLAMP0854P.TCT" SLP1616P6 250,1610 r90 bottom
Y1 "XTAL_4PIN_XTAL4_2P1X1P7MM_SM_IC_0.50 MM_230-78677_24MHZ" XTAL4_2P1X1P7MM_SM 2210,1115 r270 top
Y2 "CRYSTAL_XTAL2-3P2X1P5-SM_IC_0.9 MM_230-78676_32.768KHZ" XTAL2-3P2X1P5-SM 2830,625.02 r180 top
Y3 "OSC_ASFL_OSC4_3P2X2P5_SM_IC_1MM_230-78687_50 MHZ" OSC4_3P2X2P5_SM 1164.98,410 r0 top
Y4 "XTAL_4P_B_XTAL4_3P4X2P7_SM_IC_0.8MM_230-78680_16MHZ" XTAL4_3P4X2P7_SM 679.7,1491.9 r270 top